# Altium PCB Main.PcbDoc (part 1 of 2)
Units mil, origin at the board's own origin, x right, y up, seen from the top; angles counter-clockwise.
Board outline 3887.19 x 3937.01 mil, 4 copper layers (Top Layer, GND, 3V3, Bottom Layer), stack 62.296 mil thick; 123 components, 108 nets, 442 pads, 608 vias.
Unrouted connection lines stored in the file: 51.
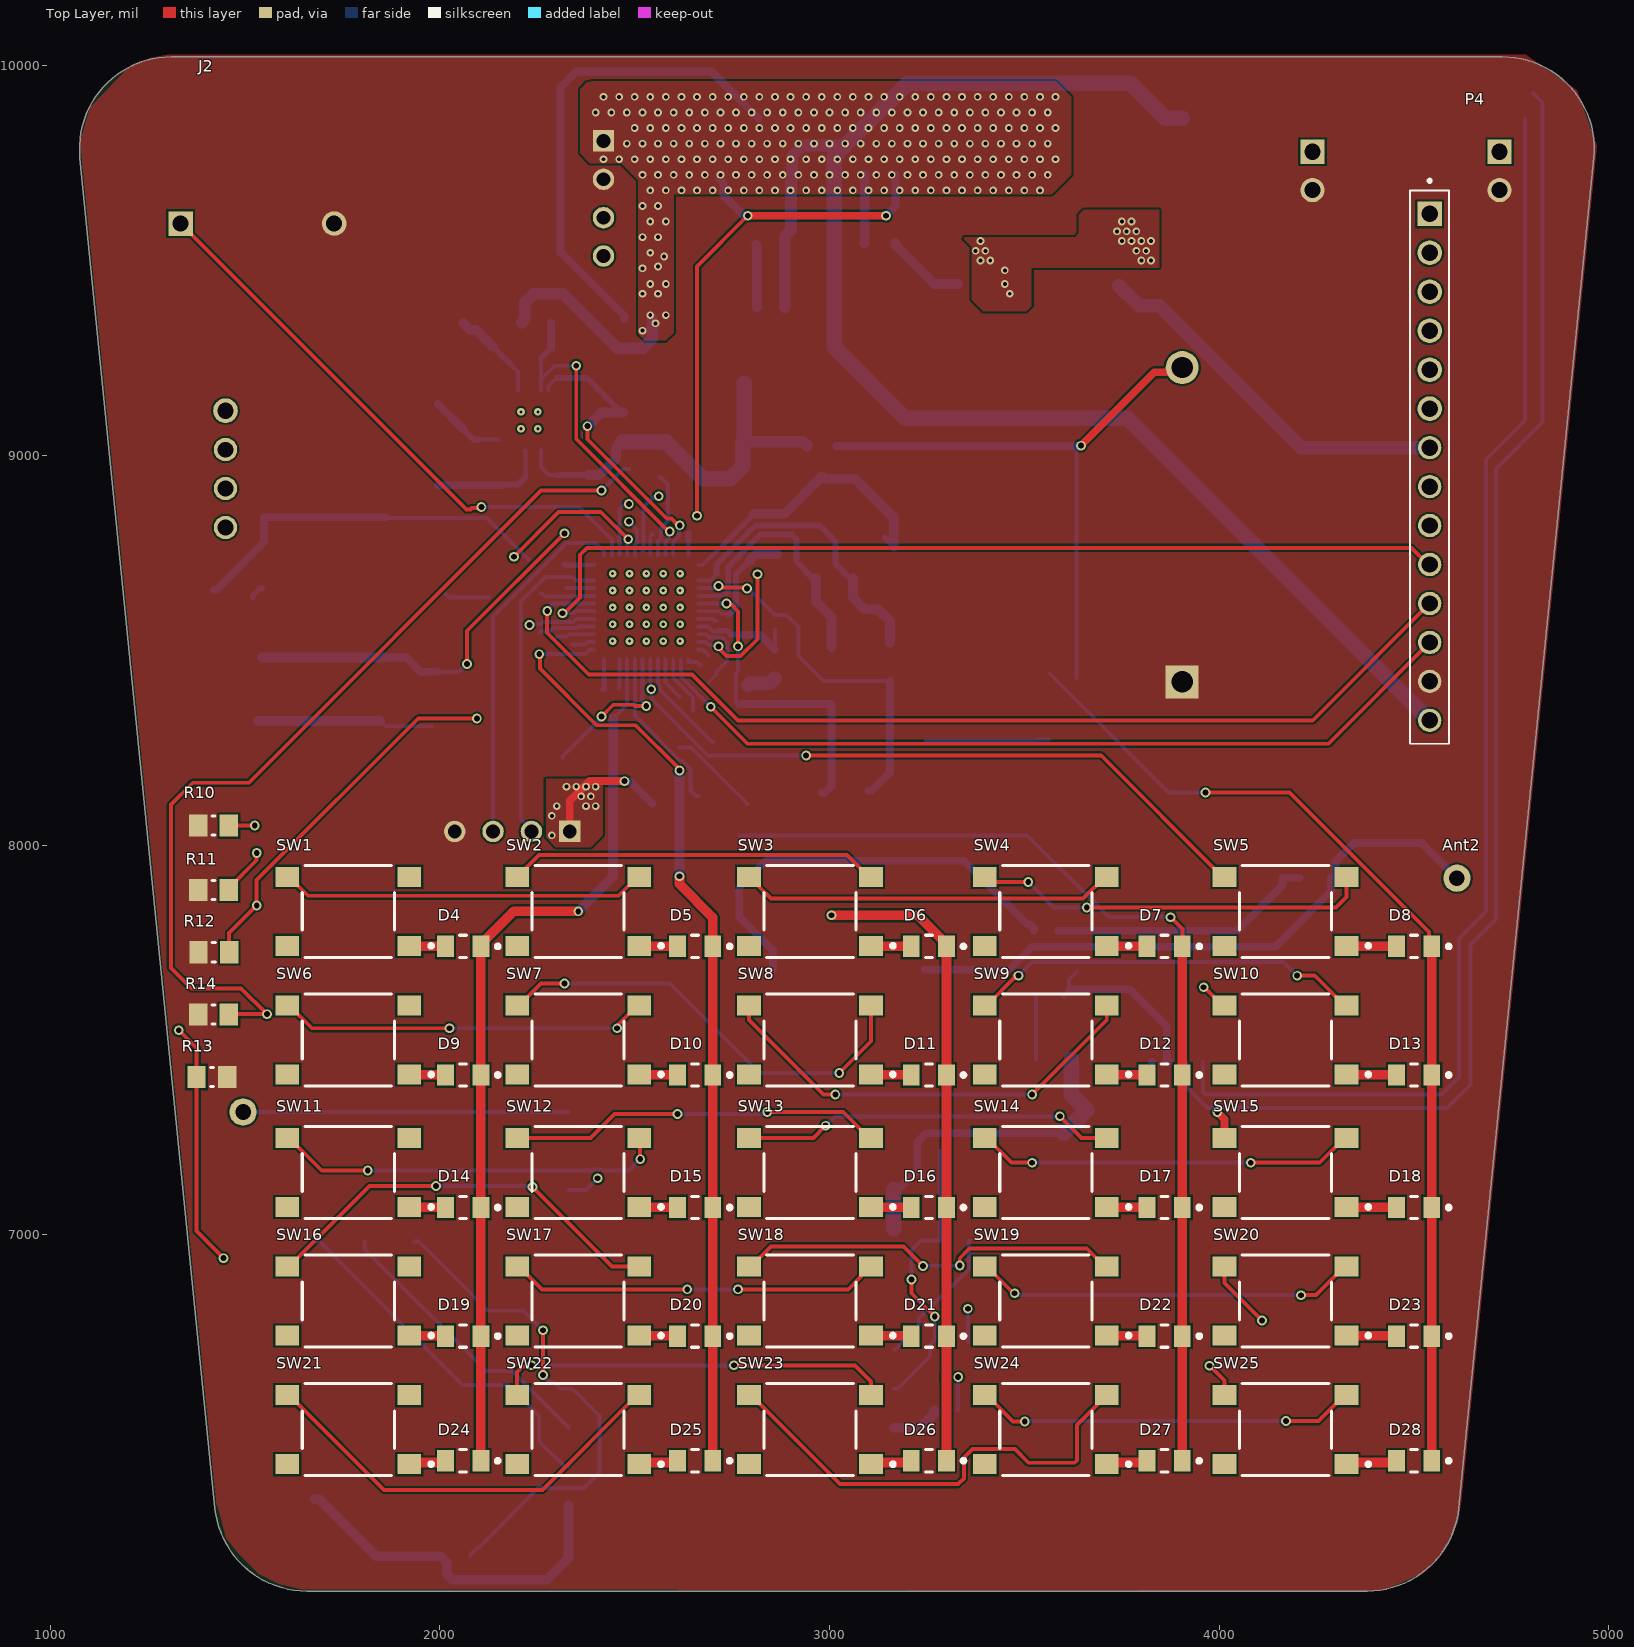
[diagram p0: Top Layer view]
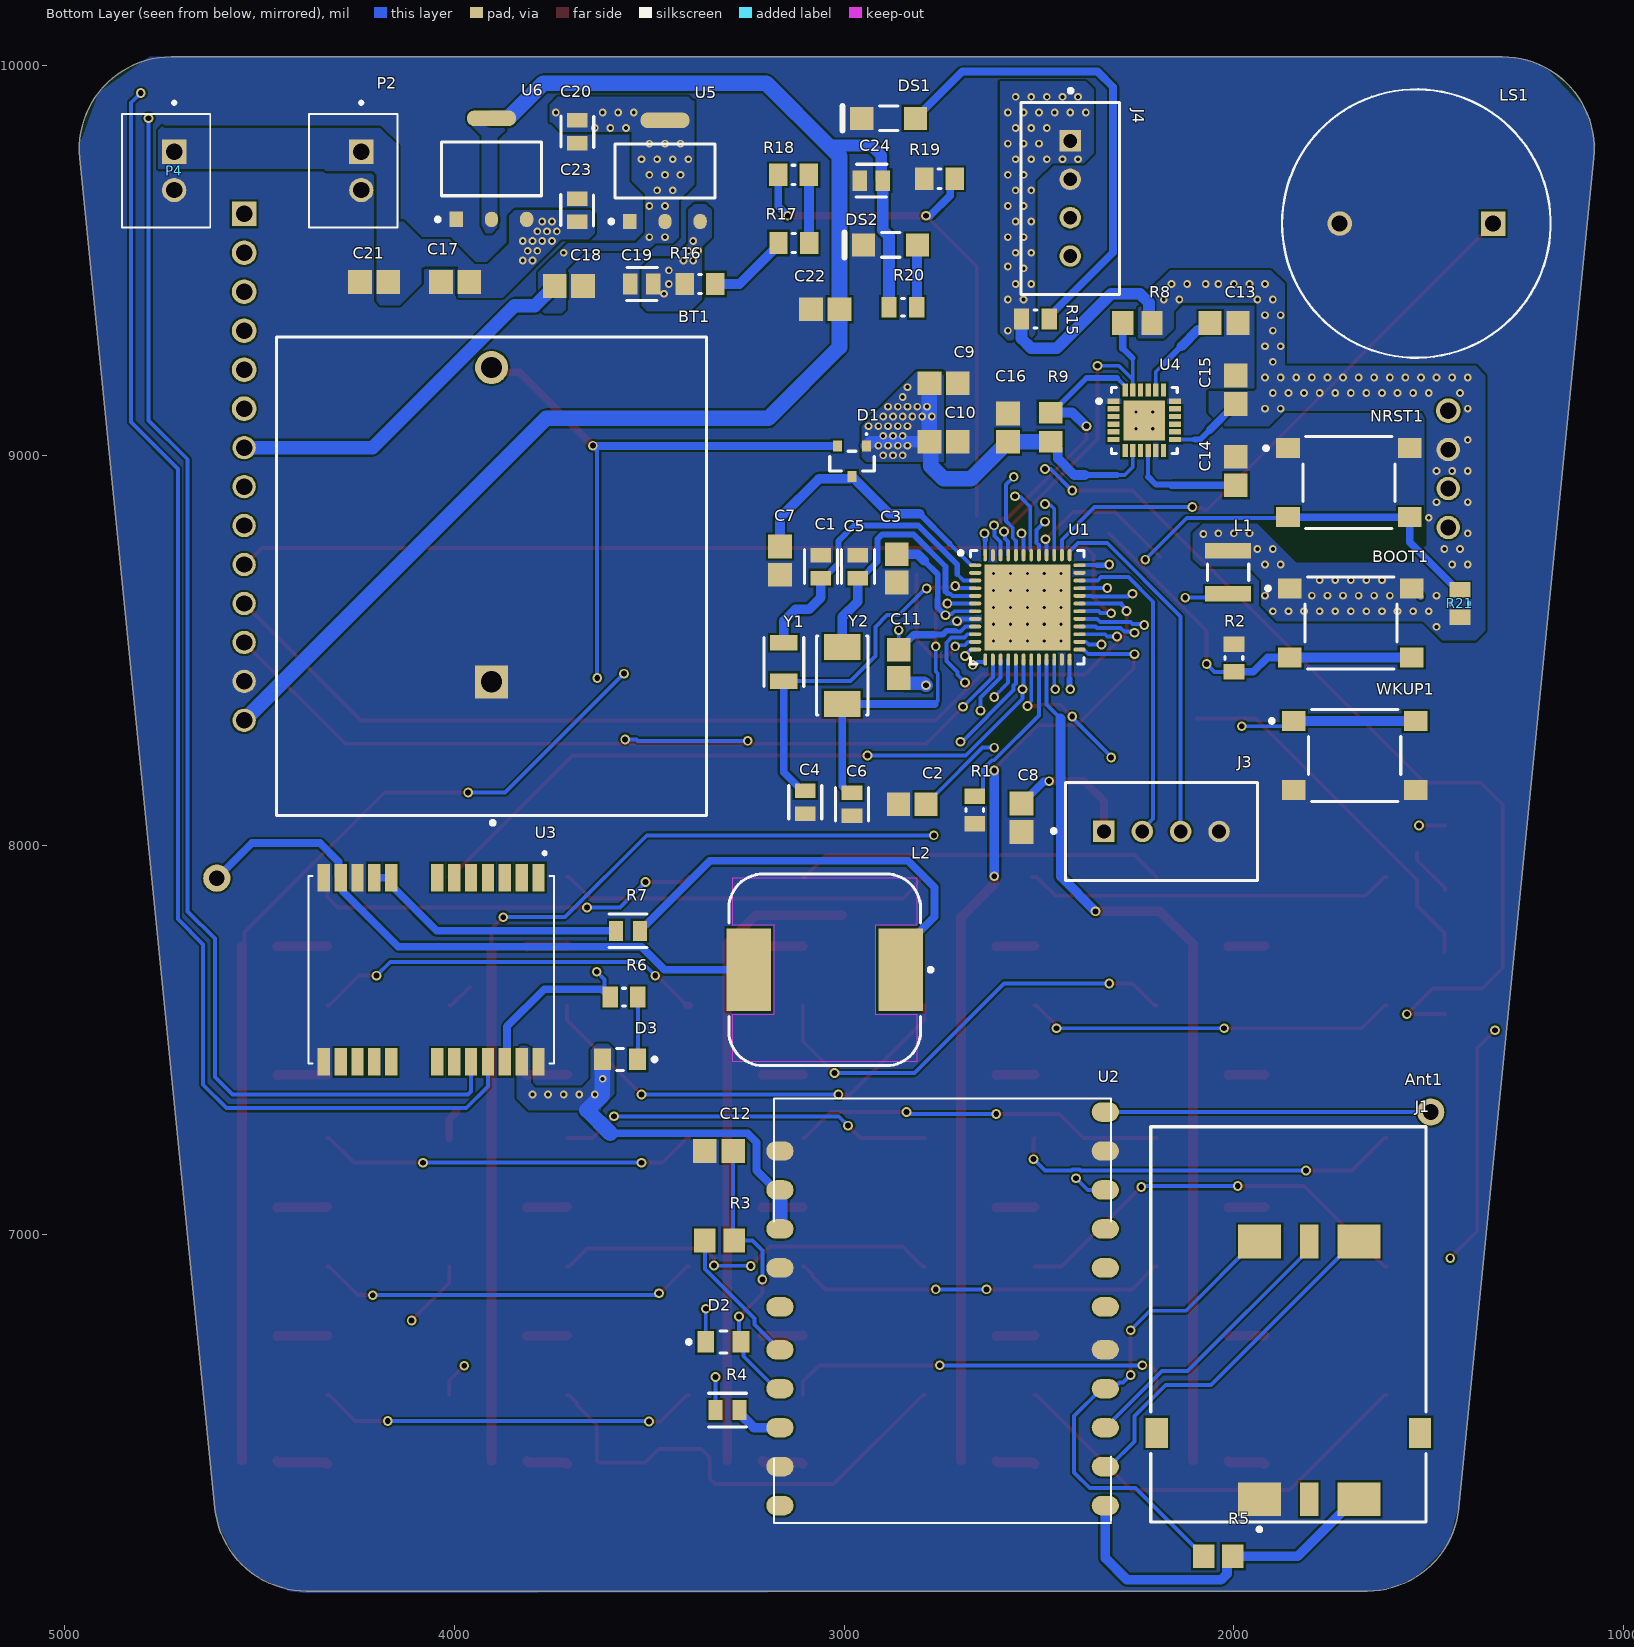
[diagram p1: Bottom Layer view, seen from below]
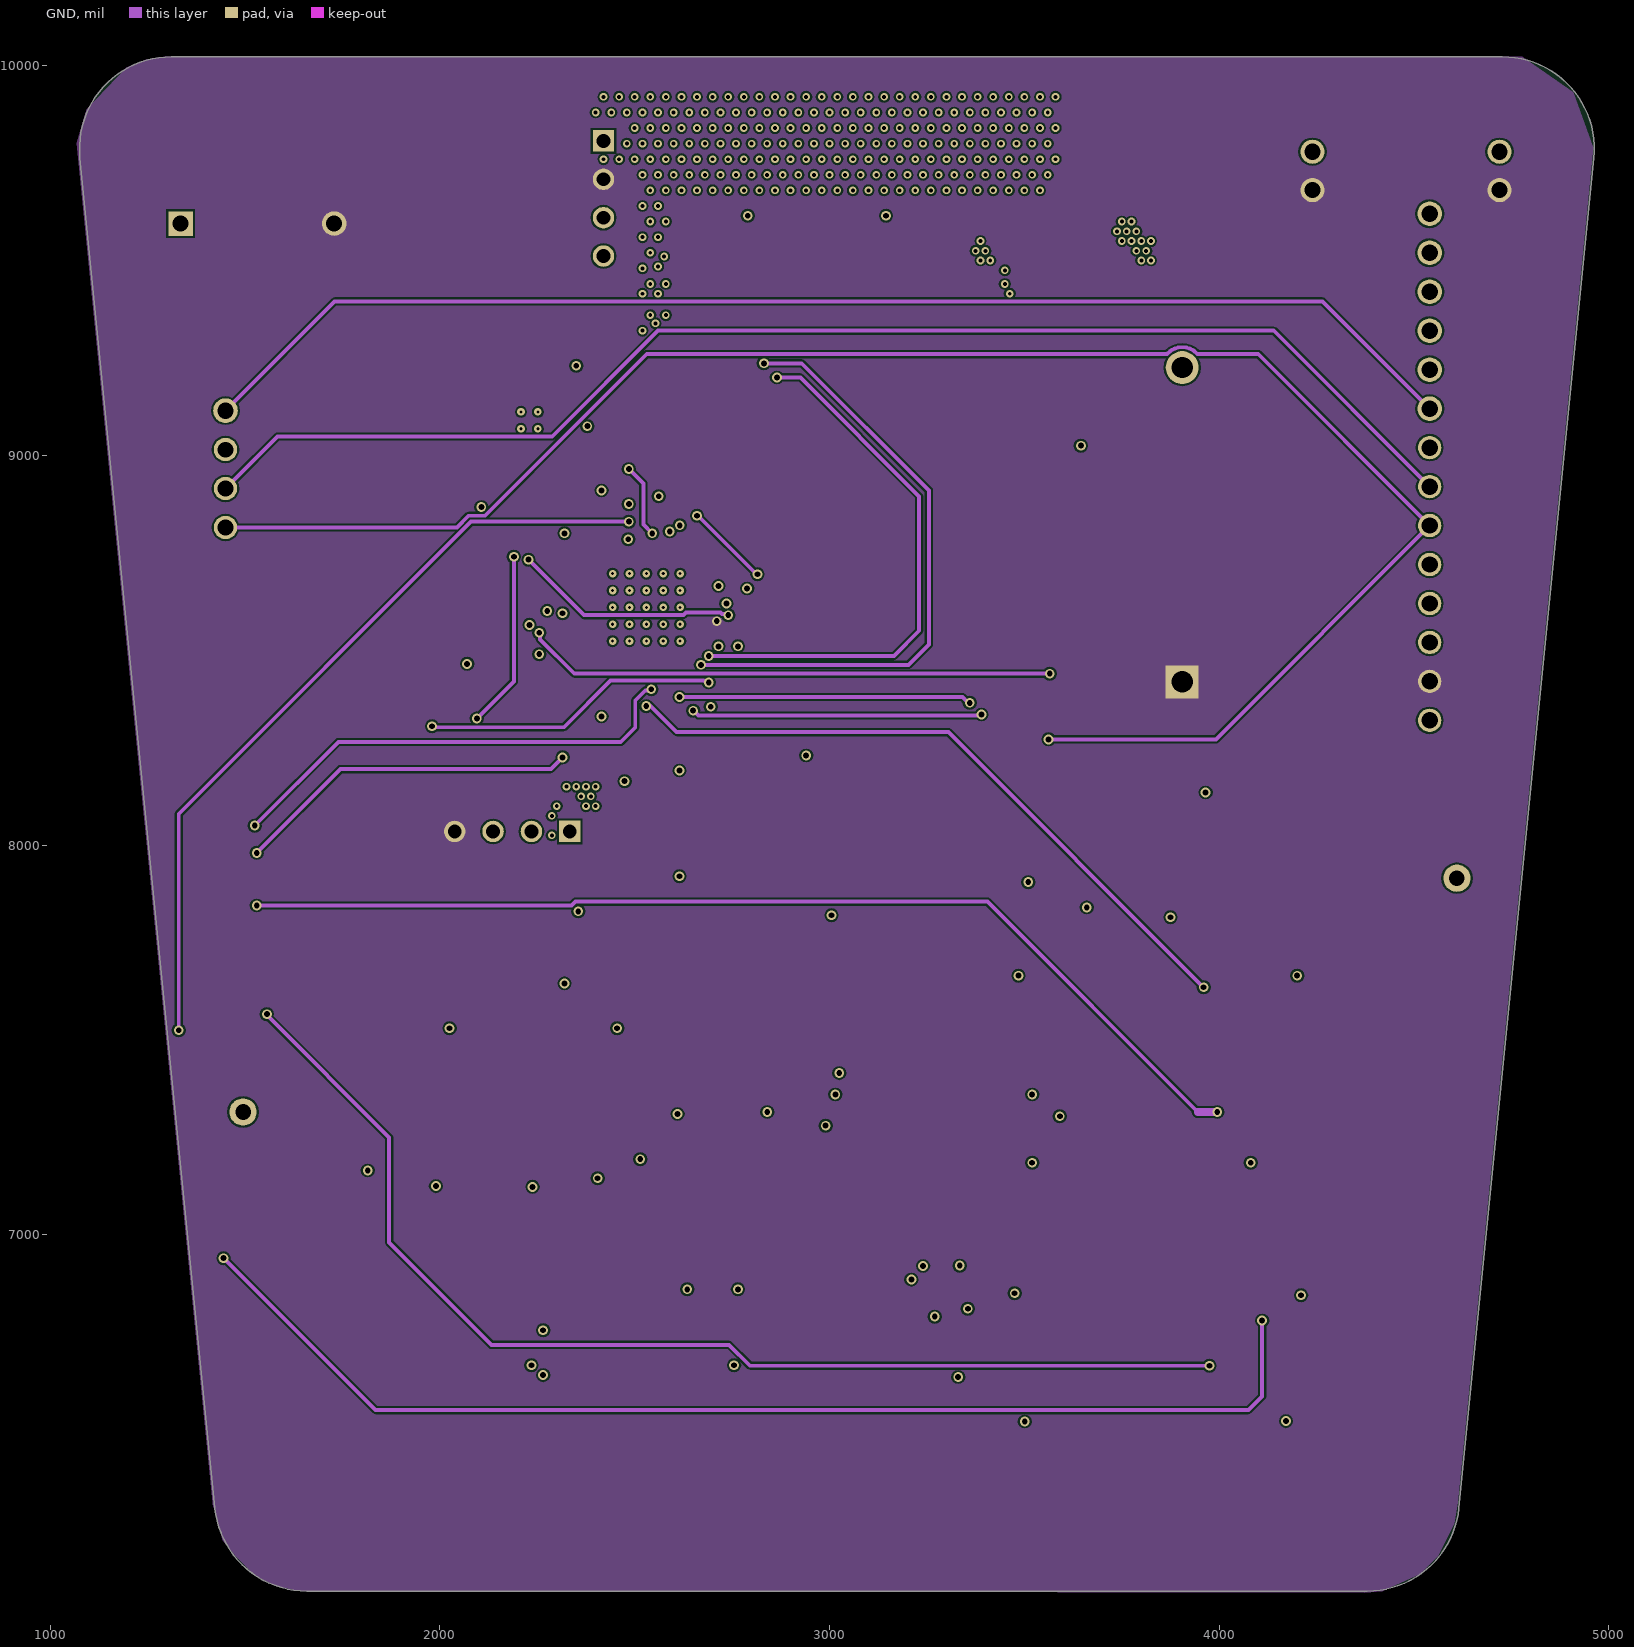
[diagram p2: GND]
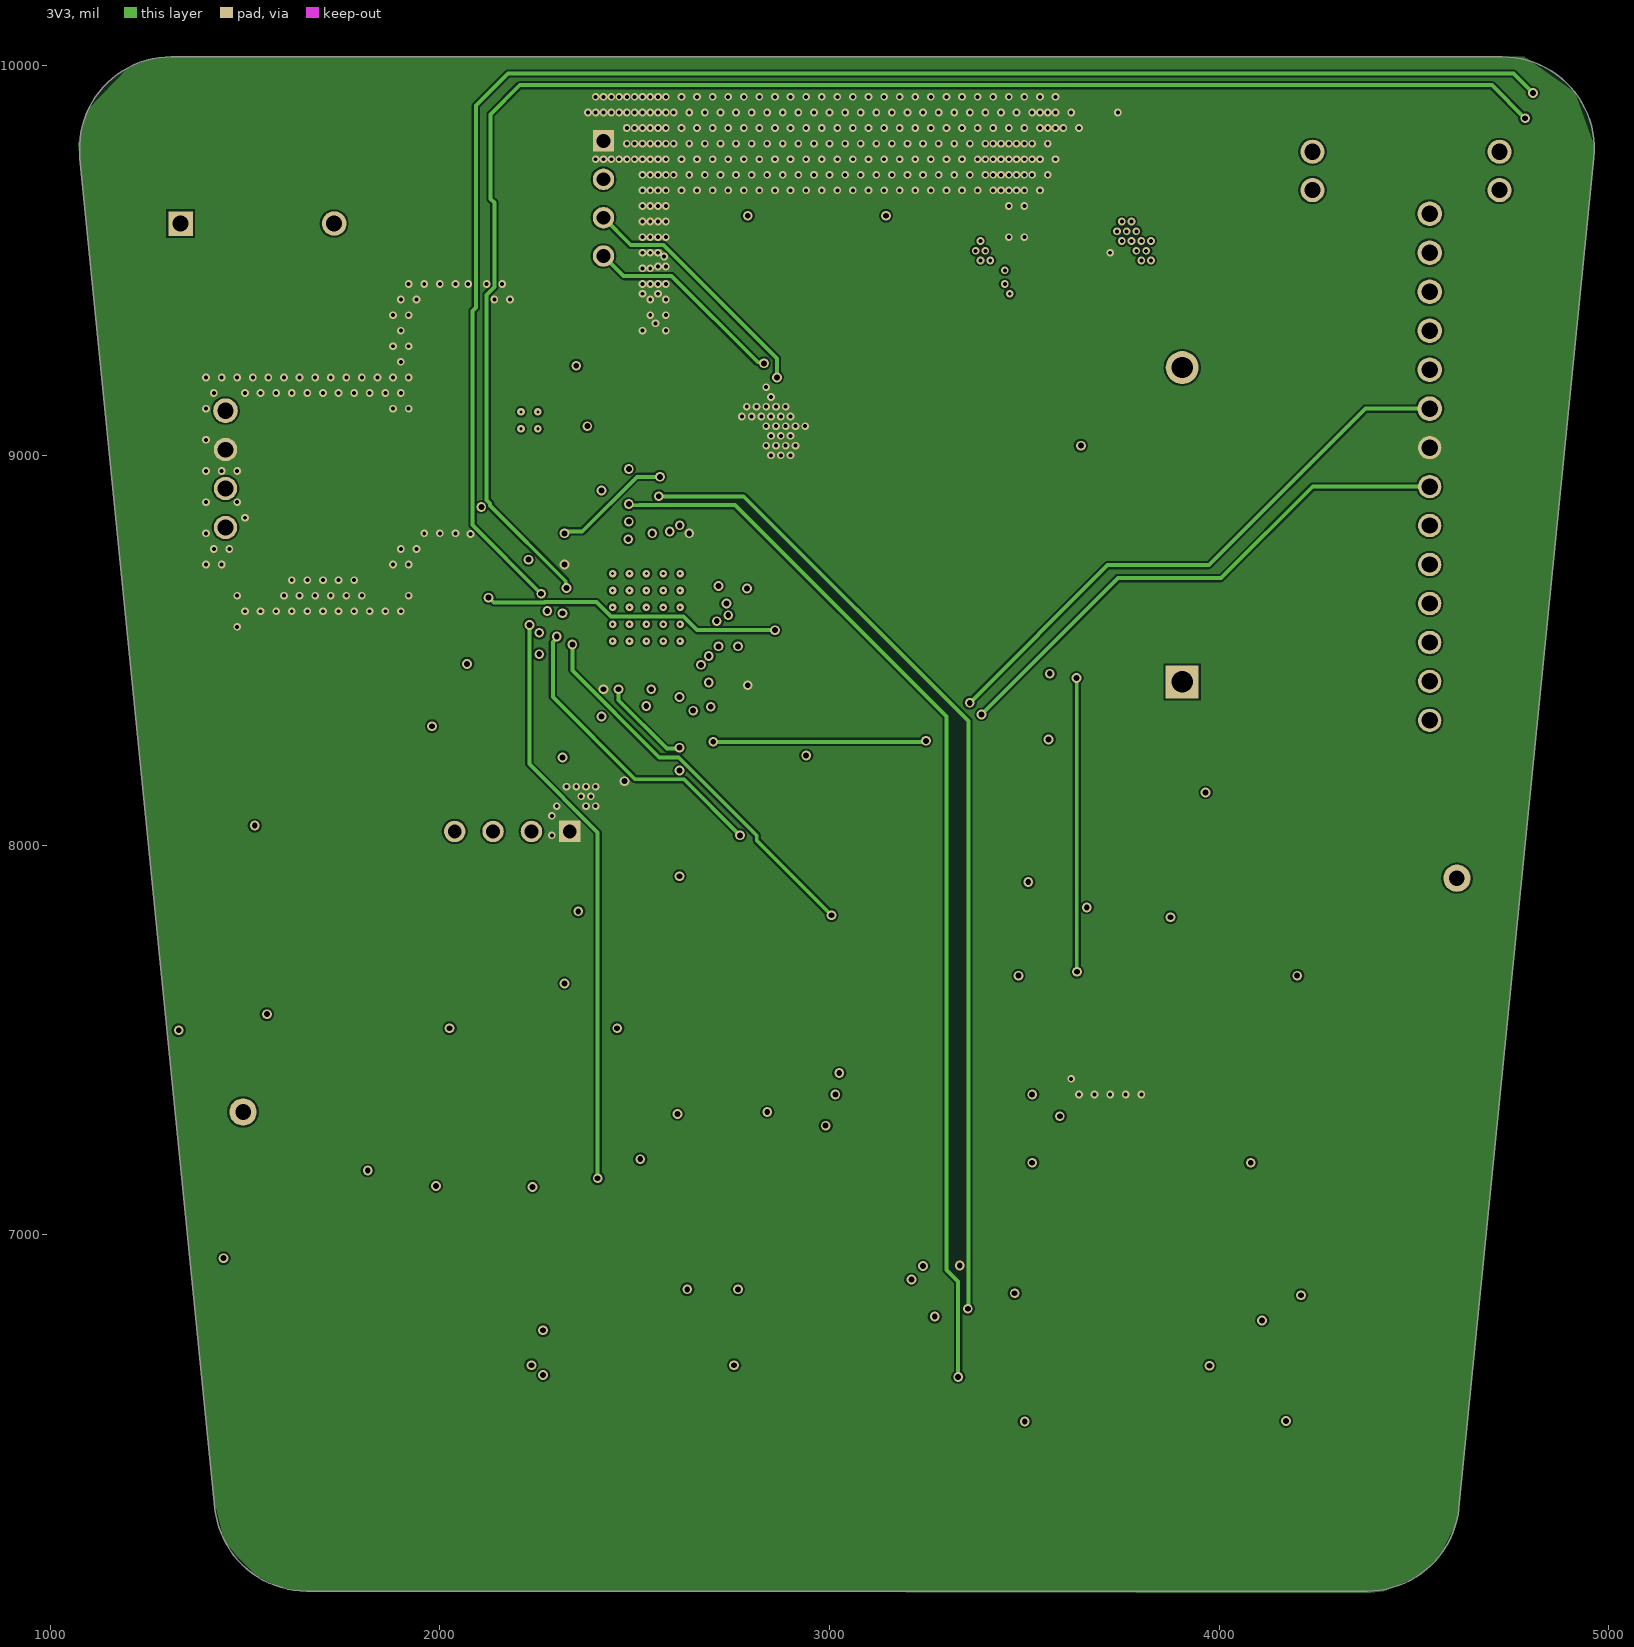
[diagram p3: 3V3]
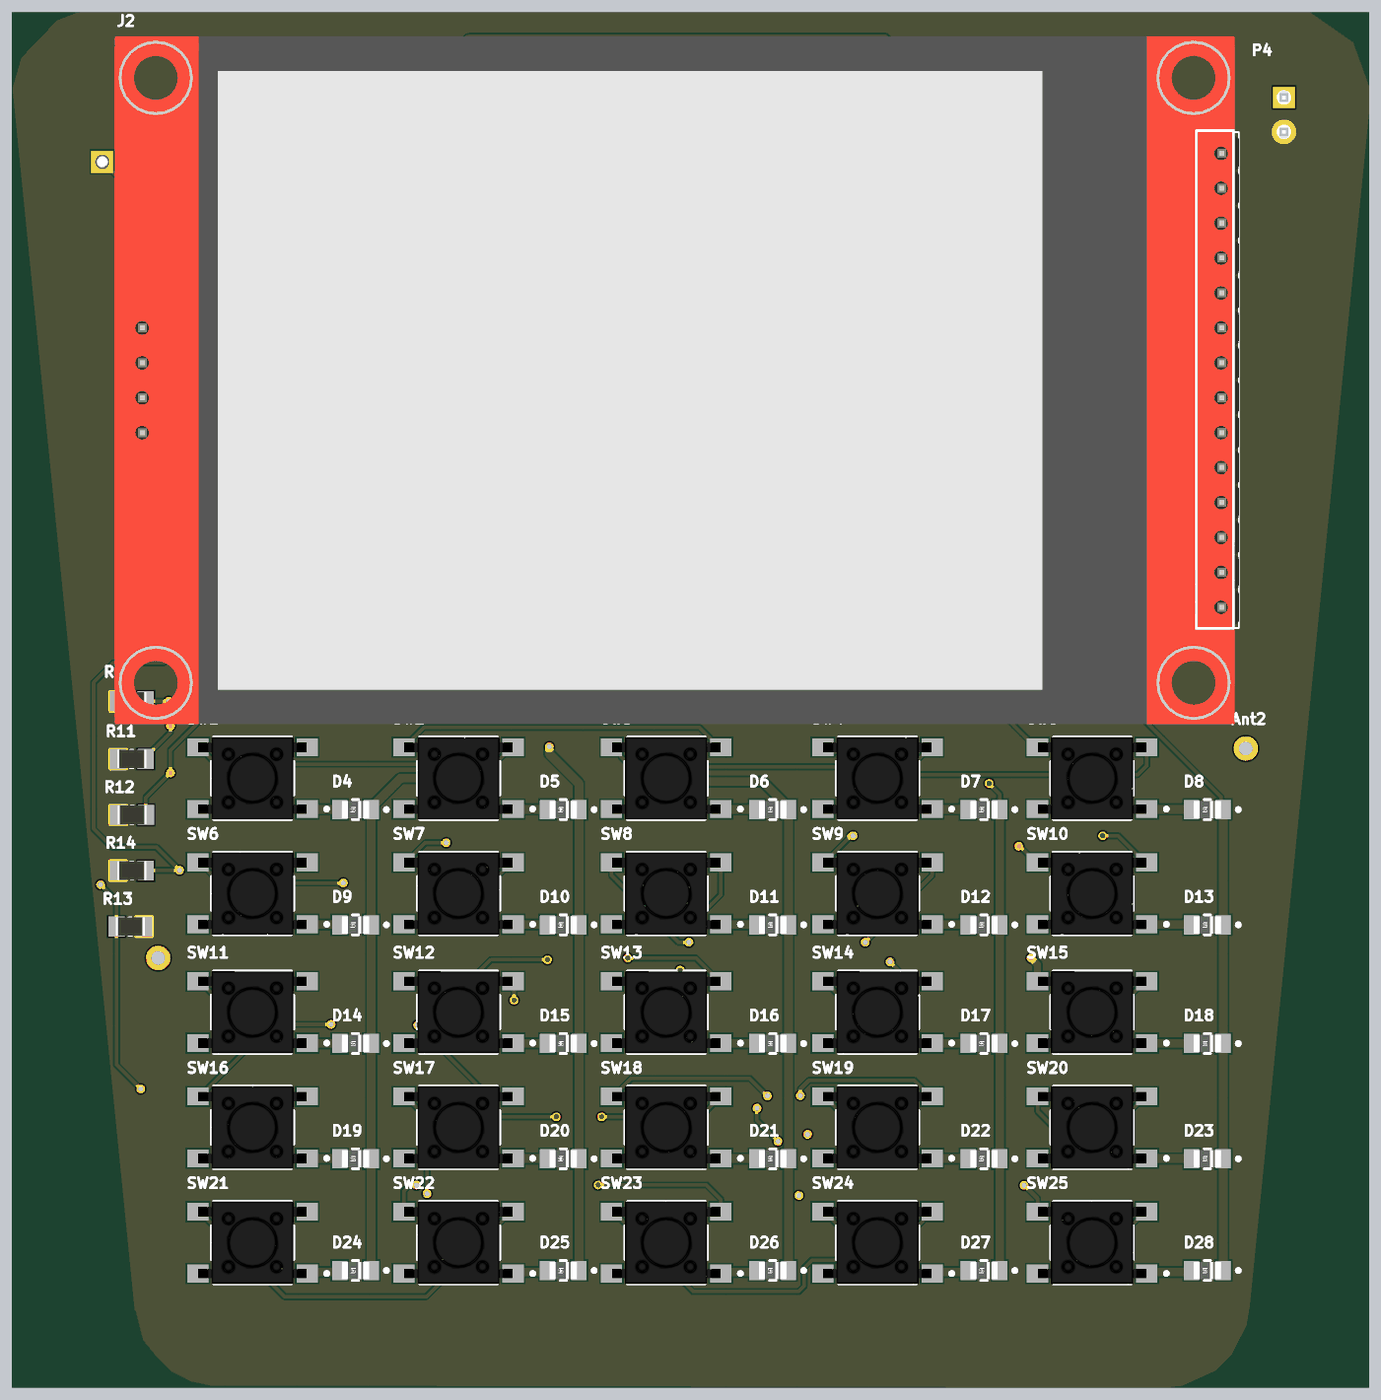
[diagram p5: 3D render of the assembled board from above, using the file's embedded part models]
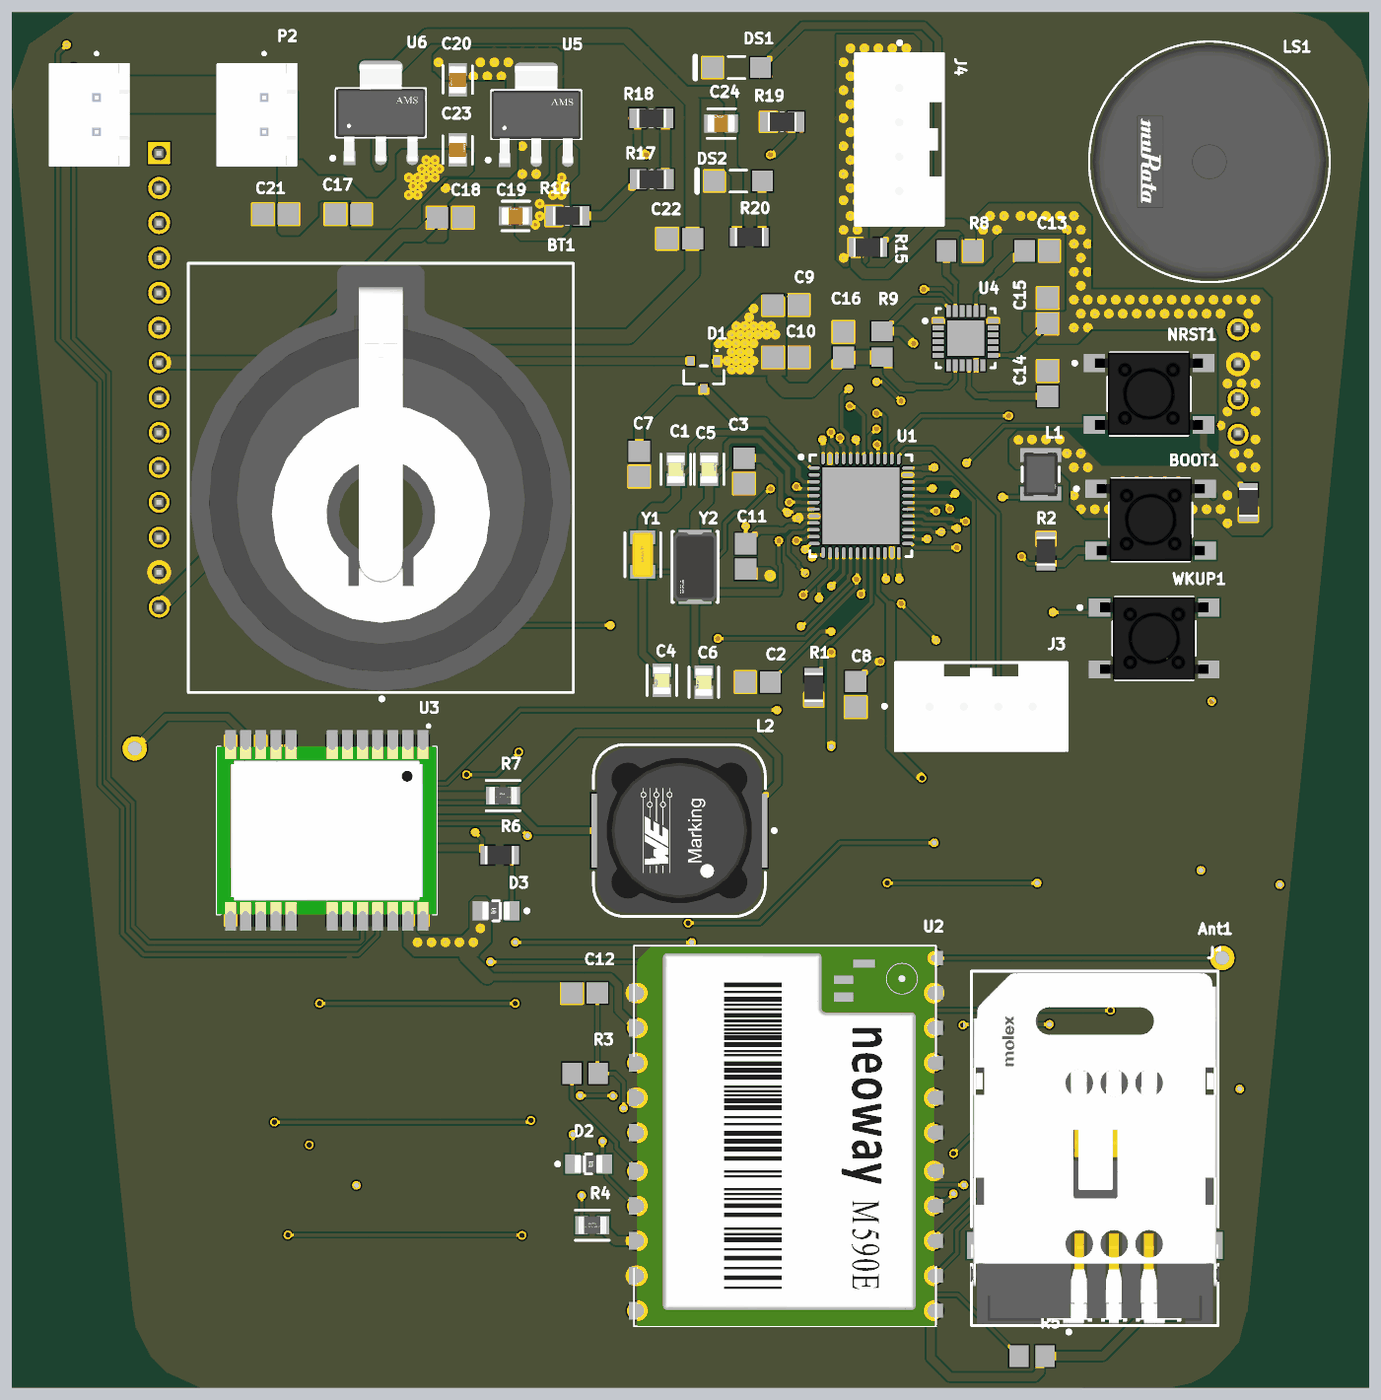
[diagram p6: 3D render of the assembled board from below, using the file's embedded part models]

## Layer stack, top to bottom
Top Solder: solder mask 1, SM-001, Dk 4
Top Layer: signal copper 1.378
Dielectric 1: prepreg 8.284, PP-017, Dk 4.4
GND: signal copper 0.689
Dielectric 3: core 41.929, Core-039, Dk 4.6
3V3: signal copper 0.3543
Dielectric 5: prepreg 8.284, PP-017, Dk 4.4
Bottom Layer: signal copper 1.378
Bottom Solder: solder mask 1, SM-001, Dk 4

## Board outline
1422.86,6298.51 1076.4,9763.08 cw(c1311.45,9786.59) 1311.45,10022.81 4726.42,10022.81 cw(c4726.42,9786.59) 4961.46,9763.08 4615.01,6298.51 cw(c4379.96,6322.02) 4379.96,6085.8 1657.91,6085.8 cw(c1657.91,6322.02)

## Design rules (kind name [scope] priority, off if disabled: settings)
Clearance Clearance_2 [All] p1: gap=5 ignorepadtopadclearanceinfootprint=TRUE
Clearance [All] p2: gap=0 ignorepadtopadclearanceinfootprint=FALSE
Clearance Clearance_1 [All] p3: gap=10 ignorepadtopadclearanceinfootprint=FALSE ismatrix=TRUE
ComponentClearance [All] p1: gap=0 collisioncheckmode=3 verticalgap=0 showdistances=FALSE
PlaneClearance [All] p1: clearance=10
PlaneConnect [All] p1: planeconnectstyle=Direct reliefexpansion=20 reliefentries=4 reliefconductorwidth=10 reliefairgap=10
PolygonConnect [All] p1: connectstyle=Direct reliefconductorwidth=10 reliefentries=4 polygonreliefangle="90 Angle" airgapwidth=10
RoutingTopology RoutingTopology_1 [InComponent('U1')] p1: topology=Starburst
RoutingTopology [All] p2: topology=Shortest
RoutingVias QFN [(InComponent('U1') OR InComponent('U4'))] p1: holewidth=4 width=5 viastyle="Through Hole" minholewidth=1 minwidth=2 maxholewidth=10 maxwidth=30
RoutingVias RoutingViaStyle_1 [All] p2: holewidth=15 width=25 viastyle="Through Hole" minholewidth=10 minwidth=15 maxholewidth=20 maxwidth=35
RoutingVias [All] p3: holewidth=28 width=50 viastyle="Through Hole" minholewidth=28 minwidth=50 maxholewidth=28 maxwidth=50
SolderMaskExpansion [All] p1: expansion=4 istentingtop=FALSE
UnpouredPolygon ModifiedPolygon_1 [All] p1:
UnpouredPolygon [All] p2:
Width MaxMinWidth_1 [All] p1: maxlimit=60 minlimit=10 preferedwidth=40 minimp=50.000000 maximp=50.000000 favimp=50.000000
Width [All] p2: maxlimit=10 minlimit=10 preferedwidth=10
25 further rules are at their usual default settings.

## Classes and differential pairs
component class "Ublox NEO-6M": Ant2 D3 L2 R6 R7 U3
component class ThermalPrinter: J4 P4
component class "TFT_LCD_2.8\" Display": J2
component class STM32: BOOT1 C1 C2 C3 C4 C5 C6 C7 C8 C9 C10 C11 D1 J3 L1 NRST1 R1 R2 R21 U1 WKUP1 Y1 Y2
component class PoweSupply: BT1 C17 C18 C19 C20 C21 C22 C23 C24 DS1 DS2 P2 R15 R16 R17 R18 R19 R20 U5 U6
component class MPU6050: C13 C14 C15 C16 R8 R9 U4
component class "M590E GSM": Ant1 C12 D2 J1 R3 R4 R5 U2
component class Buzzer: LS1
component class "6x5 Keyboard": D4 D5 D6 D7 D8 D9 D10 D11 D12 D13 D14 D15 D16 D17 D18 D19 D20 D21 D22 D23 D24 D25 D26 D27 D28 R10 R11 R12 R13 R14 SW1 SW2 SW3 SW4 SW5 SW6 SW7 SW8 SW9 SW10 SW11 SW12 SW13 SW14 SW15 SW16 SW17 SW18 SW19 SW20 SW21 SW22 SW23 SW24 SW25

## Components (designator, comment, footprint, x,y, rotation, side; value= is the part's Value field where it differs from the comment)
Ant1 "" Antenna 1495,7315 r90 bottom
Ant2 "Antenna" Antenna 4610,7915 r90 top
BOOT1 "PTS645SM43SMTR92LFS" FP-PTS645SM43SMTR92LFS-MFG 1700,8570 r180 bottom
BT1 "105" FP-105-MFG 3905,8690 r90 bottom
C1 "C0805C439C5GACTU" FP-C0805C-DN-MFG 3060,8714.53 r270 bottom value="4.3 pF"
C2 "C0805C225K9PACTU" CAPC2013X145X50ML20T25 2825.43,8105 r0 bottom value=2.2uF
C3 "08051C152KAT2A" CAPC2013X94X50ML20T25 2865,8710 r90 bottom value=100nF
C4 "C0805C439C5GACTU" FP-C0805C-DN-MFG 3100,8110 r90 bottom value="4.3 pF"
C5 "C0805C120J5GACTU" FP-C0805C-DN-MFG 2965,8714.53 r270 bottom value="12 pF"
C6 "C0805C120J5GACTU" FP-C0805C-DN-MFG 2980,8105 r90 bottom value="12 pF"
C7 "08051C152KAT2A" CAPC2013X94X50ML20T25 3165,8730 r270 bottom value=100nF
C8 "08051C152KAT2A" CAPC2013X94X50ML20T25 2545,8070 r270 bottom value=100nF
C9 "08051C152KAT2A" CAPC2013X94X50ML20T25 2745,9185 r180 bottom value=100nF
C10 "08051C152KAT2A" CAPC2013X94X50ML20T25 2745,9035 r180 bottom value=100nF
C11 "08051C152KAT2A" CAPC2013X94X50ML20T25 2860,8465 r90 bottom value=100nF
C12 "08051C152KAT2A" CAPC2013X94X50ML20T25 3321.42,7215 r180 bottom value=100pF
C13 "C0805C221J5GACTU" CAPC2013X88X50ML20T25 2025.43,9340 r0 bottom value=220pF
C14 "08051C152KAT2A" CAPC2013X94X50ML20T25 1995,8960 r270 bottom value=100nF
C15 "08051C152KAT2A" CAPC2013X94X50ML20T25 1995,9168.58 r270 bottom value=100nF
C16 "08051C152KAT2A" CAPC2013X94X50ML20T25 2580,9071.42 r270 bottom value=100nF
C17 "08051C152KAT2A" CAPC2013X94X50ML20T25 3998.58,9445 r180 bottom value=100nF
C18 "08051C152KAT2A" CAPC2013X94X50ML20T25 3706.42,9435 r0 bottom value=100nF
C19 "C0805C106K9PACTU" FP-C0805C106K9PACTU-MFG 3519.53,9440 r0 bottom
C20 "C0805C106K9PACTU" FP-C0805C106K9PACTU-MFG 3685,9830 r270 bottom
C21 "08051C152KAT2A" CAPC2013X94X50ML20T25 4206.42,9445 r180 bottom value=100nF
C22 "08051C152KAT2A" CAPC2013X94X50ML20T25 3048.58,9375 r180 bottom value=100nF
C23 "C0805C106K9PACTU" FP-C0805C106K9PACTU-MFG 3685,9629.53 r90 bottom
C24 "C0805C106K9PACTU" FP-C0805C106K9PACTU-MFG 2930.47,9705 r0 bottom
D1 "BAT54C" NXP-SOT23-3_V 2980,8985 r180 bottom
D2 "TS4148 RYG" FP-TS4148_RYG-MFG 3310,6725 r180 bottom
D3 "TS4148 RYG" FP-TS4148_RYG-MFG 3575.28,7450 r0 bottom
D4 "TS4148 RYG" FP-TS4148_RYG-MFG 2060,7740 r180 top locked
D5 "TS4148 RYG" FP-TS4148_RYG-MFG 2655,7740 r180 top locked
D6 "TS4148 RYG" FP-TS4148_RYG-MFG 3255,7740 r180 top locked
D7 "TS4148 RYG" FP-TS4148_RYG-MFG 3860,7740 r180 top locked
D8 "TS4148 RYG" FP-TS4148_RYG-MFG 4500,7740 r180 top locked
D9 "TS4148 RYG" FP-TS4148_RYG-MFG 2060,7410 r180 top locked
D10 "TS4148 RYG" FP-TS4148_RYG-MFG 2655,7410 r180 top locked
D11 "TS4148 RYG" FP-TS4148_RYG-MFG 3255,7410 r180 top locked
D12 "TS4148 RYG" FP-TS4148_RYG-MFG 3860,7410 r180 top locked
D13 "TS4148 RYG" FP-TS4148_RYG-MFG 4500,7410 r180 top locked
D14 "TS4148 RYG" FP-TS4148_RYG-MFG 2060,7070 r180 top locked
D15 "TS4148 RYG" FP-TS4148_RYG-MFG 2655,7070 r180 top locked
D16 "TS4148 RYG" FP-TS4148_RYG-MFG 3255,7070 r180 top locked
D17 "TS4148 RYG" FP-TS4148_RYG-MFG 3860,7070 r180 top locked
D18 "TS4148 RYG" FP-TS4148_RYG-MFG 4500,7070 r180 top locked
D19 "TS4148 RYG" FP-TS4148_RYG-MFG 2060,6740 r180 top locked
D20 "TS4148 RYG" FP-TS4148_RYG-MFG 2655,6740 r180 top locked
D21 "TS4148 RYG" FP-TS4148_RYG-MFG 3255,6740 r180 top locked
D22 "TS4148 RYG" FP-TS4148_RYG-MFG 3860,6740 r180 top locked
D23 "TS4148 RYG" FP-TS4148_RYG-MFG 4500,6740 r180 top locked
D24 "TS4148 RYG" FP-TS4148_RYG-MFG 2060,6420 r180 top locked
D25 "TS4148 RYG" FP-TS4148_RYG-MFG 2655,6420 r180 top locked
D26 "TS4148 RYG" FP-TS4148_RYG-MFG 3255,6420 r180 top locked
D27 "TS4148 RYG" FP-TS4148_RYG-MFG 3860,6420 r180 top locked
D28 "TS4148 RYG" FP-TS4148_RYG-MFG 4500,6420 r180 top locked
DS1 "HSMH-C150" AVAG-HSMX-C150_V 2886.1,9865 r0 bottom
DS2 "HSMH-C150" AVAG-HSMX-C150_V 2881.1,9540 r0 bottom
J1 "47388-2001" FP-47388-2001-MFG 1860,6770 r90 bottom
J2 "Display Headers" "Display Without Cutouts" 2980,8970 r270 top locked
J3 "B04B-XASK-1(LF)(SN)" FP-B04B-XASK-1_LF_SN-MFG 2185.79,8035 r0 bottom
J4 "B04B-XASK-1(LF)(SN)" FP-B04B-XASK-1_LF_SN-MFG 2420,9659.21 r90 bottom
L1 "IMC1210ER100K" FP-IMC-1210-MFG 2015,8700.12 r90 bottom
L2 "744770127" WE-PD_1280 3050,7680 r90 bottom
LS1 "PKM17EPPH4001-B0" FP-PKM17EPPH4001-B0-MFG 1531.85,9595 r0 bottom
NRST1 "PTS645SM43SMTR92LFS" FP-PTS645SM43SMTR92LFS-MFG 1705,8930 r180 bottom
P2 "Battery Connector" JST_B2B-XH-A(LF)(SN) 4260,9730 r90 bottom
P4 "Battery Connector" JST_B2B-XH-A(LF)(SN) 4740,9730 r90 bottom
R1 "RC0805FR-0710KL" RESC2013X60X35NL10T20 2665,8090 r90 bottom value=10k
R2 "RC0805FR-0710KL" RESC2013X60X35NL10T20 2000,8480 r270 bottom value=10k
R3 "ERA6AEB472V" RESC2013X60X40ML20T25 3320,6985 r180 bottom value=4.7k
R4 "CRGCQ0805F22R" FP-CRGCQ0805-IPC_C 3299.45,6550 r180 bottom value=220Ω
R5 "ERA6AEB472V" RESC2013X60X40ML20T25 2040,6175 r0 bottom value=4.7k
R6 "RC0805FR-0710KL" RESC2013X60X35NL10T20 3565,7610 r180 bottom value=10k
R7 "CRGCQ0805F22R" FP-CRGCQ0805-IPC_C 3555,7780 r180 bottom value=22Ω
R8 "ERA6AEB472V" RESC2013X60X40ML20T25 2247.6,9340 r0 bottom value=4.7k
R9 "ERA6AEB472V" RESC2013X60X40ML20T25 2470,9072.4 r90 bottom value=4.7k
R10 "RC0805FR-071KL" RESC2013X60X35ML10T20 1419.37,8050 r0 top
R11 "RC0805FR-071KL" RESC2013X60X35ML10T20 1419.37,7885 r0 top
R12 "RC0805FR-071KL" RESC2013X60X35ML10T20 1420,7725 r0 top
R13 "RC0805FR-071KL" RESC2013X60X35ML10T20 1415,7405 r180 top
R14 "RC0805FR-071KL" RESC2013X60X35ML10T20 1419.37,7565 r0 top
R15 "RC0805FR-0710KL" RESC2013X60X35NL10T20 2509.57,9350 r180 bottom value=10k
R16 "RC0805FR-071KL" RESC2013X60X35ML10T20 3370,9440 r0 bottom
R17 "RC0805FR-071KL" RESC2013X60X35ML10T20 3129.37,9545 r0 bottom
R18 "RC0805FR-071KL" RESC2013X60X35ML10T20 3130,9720 r180 bottom
R19 "RC0805FR-071KL" RESC2013X60X35ML10T20 2755.63,9710 r180 bottom
R20 "RC0805FR-0710KL" RESC2013X60X35NL10T20 2849.57,9380 r180 bottom value=10k
R21 "RC0805FR-0710KL" RESC2013X60X35NL10T20 1420,8620 r90 bottom value=10k
SW1 "PTS645SM43SMTR92LFS" FP-PTS645SM43SMTR92LFS-MFG 1765,7830 r180 top locked
SW2 "PTS645SM43SMTR92LFS" FP-PTS645SM43SMTR92LFS-MFG 2355,7830 r180 top locked
SW3 "PTS645SM43SMTR92LFS" FP-PTS645SM43SMTR92LFS-MFG 2950,7830 r180 top locked
SW4 "PTS645SM43SMTR92LFS" FP-PTS645SM43SMTR92LFS-MFG 3555,7830 r180 top locked
SW5 "PTS645SM43SMTR92LFS" FP-PTS645SM43SMTR92LFS-MFG 4170,7830 r180 top locked
SW6 "PTS645SM43SMTR92LFS" FP-PTS645SM43SMTR92LFS-MFG 1765,7500 r180 top locked
SW7 "PTS645SM43SMTR92LFS" FP-PTS645SM43SMTR92LFS-MFG 2355,7500 r180 top locked
SW8 "PTS645SM43SMTR92LFS" FP-PTS645SM43SMTR92LFS-MFG 2950,7500 r180 top locked
SW9 "PTS645SM43SMTR92LFS" FP-PTS645SM43SMTR92LFS-MFG 3555,7500 r180 top locked
SW10 "PTS645SM43SMTR92LFS" FP-PTS645SM43SMTR92LFS-MFG 4170,7500 r180 top locked
SW11 "PTS645SM43SMTR92LFS" FP-PTS645SM43SMTR92LFS-MFG 1765,7160 r180 top locked
SW12 "PTS645SM43SMTR92LFS" FP-PTS645SM43SMTR92LFS-MFG 2355,7160 r180 top locked
SW13 "PTS645SM43SMTR92LFS" FP-PTS645SM43SMTR92LFS-MFG 2950,7160 r180 top locked
SW14 "PTS645SM43SMTR92LFS" FP-PTS645SM43SMTR92LFS-MFG 3555,7160 r180 top locked
SW15 "PTS645SM43SMTR92LFS" FP-PTS645SM43SMTR92LFS-MFG 4170,7160 r180 top locked
SW16 "PTS645SM43SMTR92LFS" FP-PTS645SM43SMTR92LFS-MFG 1765,6830 r180 top locked
SW17 "PTS645SM43SMTR92LFS" FP-PTS645SM43SMTR92LFS-MFG 2355,6830 r180 top locked
SW18 "PTS645SM43SMTR92LFS" FP-PTS645SM43SMTR92LFS-MFG 2950,6830 r180 top locked
SW19 "PTS645SM43SMTR92LFS" FP-PTS645SM43SMTR92LFS-MFG 3555,6830 r180 top locked
SW20 "PTS645SM43SMTR92LFS" FP-PTS645SM43SMTR92LFS-MFG 4170,6830 r180 top locked
SW21 "PTS645SM43SMTR92LFS" FP-PTS645SM43SMTR92LFS-MFG 1765,6500 r180 top locked
SW22 "PTS645SM43SMTR92LFS" FP-PTS645SM43SMTR92LFS-MFG 2355,6500 r180 top locked
SW23 "PTS645SM43SMTR92LFS" FP-PTS645SM43SMTR92LFS-MFG 2950,6500 r180 top locked
SW24 "PTS645SM43SMTR92LFS" FP-PTS645SM43SMTR92LFS-MFG 3555,6500 r180 top locked
SW25 "PTS645SM43SMTR92LFS" FP-PTS645SM43SMTR92LFS-MFG 4170,6500 r180 top locked
U1 "STM32F411CEU6" STM-UFQFPN48_L 2530,8610 r180 bottom
U2 "Neoway_M590E" Neoway-M590E 2725,6730 r180 bottom
U3 "NEO-6M-GPS" XCVR_NEO-6M-GPS 4060,7680 r270 bottom
U4 "MPU-6050" IS-QFN-24_V 2230,9090 r180 bottom
U5 "AMS1117-3.3" FP-AMS1117-IPC_C 3460,9730 r90 bottom
U6 "AMS1117-5.0" FP-AMS1117-IPC_C 3905,9735.28 r90 bottom
WKUP1 "PTS645SM43SMTR92LFS" FP-PTS645SM43SMTR92LFS-MFG 1690,8230 r180 bottom
Y1 "ABS07-120-32.768KHZ-T" FP-ABS07-120-MFG 3155,8470 r270 bottom
Y2 "AA-25.000MALE-T" FP-AA-MFG 3005,8435 r270 bottom

## Footprints (in the part's own frame and the unit in brackets; to place one, negate y for a bottom-side part, rotate by r counter-clockwise, add the part's x,y. Pads: shape width x height; smd on the part's side, far side on the other; paste and mask are expansions set on the pad)
Antenna [mil]
  round 70 hole 40: 1(0,0)
AVAG-HSMX-C150_V [mm] "SMD, 2-Leads, Body 3.2x1.6mm"
  rect 1.5x1.5 smd: 1(-1.75,0) 2(1.75,0)
  silkscreen extent -0.6,-0.8 3,0.8, body extent -1.6,-0.8 1.6,0.8, height 1.1
CAPC2013X88X50ML20T25 [mm] "Chip Capacitor, 2-Leads, Body 2.00x1.25mm, IPC Low Density"
  rect 1.5x1.55 smd: 1(-0.9,0) 2(0.9,0)
  body extent -1.1,-0.72 1.1,0.72, height 0.88
CAPC2013X94X50ML20T25 [mm] "Chip Capacitor, 2-Leads, Body 2.01x1.25mm, IPC Low Density"
  rect 1.55x1.55 smd: 1(-0.925,0) 2(0.925,0)
  body extent -1.1,-0.72 1.11,0.72, height 0.94
CAPC2013X145X50ML20T25 [mm] "Chip Capacitor, 2-Leads, Body 2.00x1.25mm, IPC Low Density"
  rect 1.5x1.55 smd: 1(-0.9,0) 2(0.9,0)
  body extent -1.1,-0.72 1.1,0.72, height 1.45
"Display Without Cutouts" [mil]
  rect 63.19x63.19 / inner round 63.19 / far side rect 63.19x63.19 hole 42.13: 1(-650,1560)
  round 63.19 hole 42.13: 2(-550,1560) 3(-450,1560) 4(-350,1560) 5(-250,1560) 6(-150,1560) 6(-145,-1530)
  round 60 hole 42: 7(-50,1560) 8(50,1560) 9(150,1560) 10(250,1560) 11(350,1560) 12(450,1560) 13(550,1560) 14(650,1560)
  round 60 hole 40: 7(-45,-1530) 8(55,-1530) 9(155,-1530)
  silkscreen extent -739,1510 710,1610, body extent -984,-1610 985,1611, height 320
FP-105-MFG [mm]
  rect 2.145x2.145 hole 1.395 paste-2539.97 mask+0: 1(-6.89,0)
  round 2.145 hole 1.395 paste-2539.97 mask+0: 2(13.6,0)
  silkscreen extent -16.2,-14.01 15.6,14.01, body extent -15.48,-13.88 15.48,13.88, height 8.76
FP-47388-2001-MFG [mm]
  rect 1.95x1.45 smd paste+0 mask+0: 1(-7.07,8.58) 2(-7.07,-8.58)
  rect 2.2x2.8 smd paste+0 mask+0: C1(-11.4,-4.6) C3(-11.4,1.88) C5(5.4,-4.6) C7(5.4,1.88)
  rect 2.2x1.2 smd paste+0 mask+0: C2(-11.4,-1.36) C6(5.4,-1.36)
  silkscreen extent -13.48,-8.97 12.89,8.97, body extent -12.76,-9.05 12.76,9.05, height 2
FP-AA-MFG [mm]
  rect 1.7x2.4 smd paste+0 mask+0: 1(-1.85,0) 2(1.85,0)
  silkscreen extent -2.58,-1.67 2.58,1.67, body extent -2.5,-1.6 2.5,1.6, height 1.35
FP-ABS07-120-MFG [mm]
  rect 1x1.8 smd paste+0 mask+0: 1(-1.25,0) 2(1.25,0)
  silkscreen extent -1.6,-1.3 1.6,1.3, body extent -1.6,-0.75 1.6,0.75, height 0.9
FP-AMS1117-IPC_C [mm]
  rect 1.004x0.872 smd paste+0 mask+0: 1(-3.295,2.29)
  rrect100% 1.004x0.872 smd paste+0 mask+0: 2(-3.295,0) 3(-3.295,-2.29)
  rrect87% 1.004x3.182 smd paste+0 mask+0: 4(3.295,0)
  silkscreen extent -3.42,-3.25 1.75,3.63, body extent -3.53,-3.25 3.53,3.25, height 1.8
FP-B04B-XASK-1_LF_SN-MFG [mm]
  rect 1.4x1.4 hole 0.9 paste-2539.97 mask+0: 1(3.75,0)
  round 1.4 hole 0.9 paste-2539.97 mask+0: 2(1.25,0) 3(-1.25,0) 4(-3.75,0)
  silkscreen extent -6.25,-3.2 7.15,3.2, body extent -6.25,-3.2 6.25,3.2, height 8.8
FP-C0805C106K9PACTU-MFG [mm]
  rect 0.95x1.35 smd paste+0 mask+0: 1(-0.75,0) 2(0.75,0)
  silkscreen extent -1.03,-1.07 1,1.07, body extent -1,-0.63 1,0.63, height 1.4
FP-C0805C-DN-MFG [mm]
  rect 0.95x1.35 smd paste+0 mask+0: 1(-0.75,0) 2(0.75,0)
  silkscreen extent -1.1,-1.07 1.1,1.07, body extent -1,-0.63 1,0.63, height 0.88
FP-CRGCQ0805-IPC_C [mil]
  rect 35.67x51.57 smd paste+0 mask+0: 1(-30.55,0) 2(30.55,0)
  silkscreen extent -48,-43 48,43, body extent -39,-25 39,25, height 26
FP-IMC-1210-MFG [mm]
  rect 1x3 smd paste+0 mask+0: 1(-1.4,0) 2(1.4,0)
  silkscreen extent -0.53,-1.35 0.53,1.35, body extent -1.6,-1.24 1.6,1.24, height 2.41
FP-PKM17EPPH4001-B0-MFG [mm]
  rect 1.6x1.6 hole 1.05 paste-2539.97 mask+0: 1(-5,0)
  round 1.6 hole 1.05 paste-2539.97 mask+0: 2(5,0)
  silkscreen extent -8.75,-8.75 8.75,8.75, body extent -8.5,-8.49 8.5,8.49, height 9.2
FP-PTS645SM43SMTR92LFS-MFG [mm]
  rect 1.55x1.3 smd paste+0 mask+0: 1(-3.975,2.25) 2(3.975,2.25) 3(-3.975,-2.25) 4(3.975,-2.25)
  silkscreen extent -5.53,-3 3,3, body extent -3.95,-2.99 3.95,3.01, height 7.79
FP-TS4148_RYG-MFG [mm]
  rect 1.1x1.4 smd paste+0 mask+0: 1(-1.15,0) 2(1.15,0)
  silkscreen extent -2.38,-0.73 0.22,0.73, body extent -1,-0.63 1,0.63, height 0.85
IS-QFN-24_V [mm] "QFN, 24-Leads, Body 4x4mm, Pitch 0.5mm, Thermal Pad 2.7x2.6mm"
  rect 0.8x0.35 smd: 1(-2,1.25) 2(-2,0.75) 3(-2,0.25) 4(-2,-0.25) 5(-2,-0.75) 6(-2,-1.25) 13(2,-1.25) 14(2,-0.75) 15(2,-0.25) 16(2,0.25) 17(2,0.75) 18(2,1.25)
  rect 0.35x0.85 smd mask+0.102: 7(-1.25,-1.975) 8(-0.75,-1.975) 9(-0.25,-1.975) 10(0.25,-1.975) 11(0.75,-1.975) 12(1.25,-1.975) 19(1.25,1.975) 20(0.75,1.975) 21(0.25,1.975) 22(-0.25,1.975) 23(-0.75,1.975) 24(-1.25,1.975)
  rect 2.7x2.6 smd: 25(0,0)
  silkscreen extent -3.08,-2.15 2.15,2.15, body extent -2,-2 2,2, height 0.95
JST_B2B-XH-A(LF)(SN) [mm]
  rect 1.575x1.575 / inner round 1.575 / far side rect 1.575x1.575 hole 1.05: 1(1.25,-0.525)
  round 1.575 hole 1.05: 2(-1.25,-0.525)
  silkscreen extent -3.7,-2.87 4.54,2.88, body extent -3.7,-2.88 3.7,2.88, height 7
Neoway-M590E [mil]
  oval 70x50 smd paste-78.74: 1(-440,485) 2(-440,385) 3(-440,285) 4(-440,185) 5(-440,85) 6(-440,-25) 7(-440,-125) 8(-440,-225) 9(-440,-325) 10(-440,-425) 11(395,-425) 12(395,-325) 13(395,-225) 14(395,-125) 15(395,-25) 16(395,85) 17(395,185) 18(395,285) 19(395,385) 20(395,485) 21(395,585)
  silkscreen extent -455,-470 410,620, body extent -445,-468 405,618, height 100
NXP-SOT23-3_V [mm] "SOT23, 3-Leads, Body 1.3x2.9mm, Pitch 0.95mm"
  rect 0.6x0.7 smd paste-0.05: 1(0.95,1) 2(-0.95,1) 3(0,-1)
  silkscreen extent -1.45,-0.65 1.45,1.79, body extent -1.45,-0.65 1.45,0.65, height 1.1
RESC2013X60X35ML10T20 [mm] "Chip Resistor, 2-Leads, Body 2.1x1.35mm, IPC Low Density"
  rect 1.2x1.45 smd: 1(-1,0) 2(1,0)
  silkscreen extent -0.1,-0.62 0.1,0.62, body extent -1.05,-0.68 1.05,0.67, height 0.6
RESC2013X60X35NL10T20 [mm] "Chip Resistor, 2-Leads, Body 2.1x1.35mm, IPC Medium Density"
  rect 1x1.35 smd: 1(-0.9,0) 2(0.9,0)
  silkscreen extent -0.1,-0.58 0.1,0.58, body extent -1.05,-0.68 1.05,0.67, height 0.6
RESC2013X60X40ML20T25 [mm] "Chip Resistor, 2-Leads, Body 2.00x1.25mm, IPC Low Density"
  rect 1.4x1.55 smd: 1(-0.95,0) 2(0.95,0)
  body extent -1.1,-0.72 1.1,0.72, height 0.6
STM-UFQFPN48_L [mm] "QFN, 48-Leads, Body 7.1x7.1mm, Pitch 0.5mm, Thermal Pad 5.6x5.6mm, IPC High Density"
  oval 0.8x0.25 smd: 1(-3.4,2.75) 2(-3.4,2.25) 3(-3.4,1.75) 4(-3.4,1.25) 5(-3.4,0.75) 6(-3.4,0.25) 7(-3.4,-0.25) 8(-3.4,-0.75) 9(-3.4,-1.25) 10(-3.4,-1.75) 11(-3.4,-2.25) 12(-3.4,-2.75) 25(3.4,-2.75) 26(3.4,-2.25) 27(3.4,-1.75) 28(3.4,-1.25) 29(3.4,-0.75) 30(3.4,-0.25) 31(3.4,0.25) 32(3.4,0.75) 33(3.4,1.25) 34(3.4,1.75) 35(3.4,2.25) 36(3.4,2.75)
  oval 0.25x0.8 smd: 13(-2.75,-3.4) 14(-2.25,-3.4) 15(-1.75,-3.4) 16(-1.25,-3.4) 17(-0.75,-3.4) 18(-0.25,-3.4) 19(0.25,-3.4) 20(0.75,-3.4) 21(1.25,-3.4) 22(1.75,-3.4) 23(2.25,-3.4) 24(2.75,-3.4) 37(2.75,3.4) 38(2.25,3.4) 39(1.75,3.4) 40(1.25,3.4) 41(0.75,3.4) 42(0.25,3.4) 43(-0.25,3.4) 44(-0.75,3.4) 45(-1.25,3.4) 46(-1.75,3.4) 47(-2.25,3.4) 48(-2.75,3.4)
  rect 5.6x5.6 smd: 49(0,0)
  silkscreen extent -4.48,-3.7 3.7,3.7, body extent -3.55,-3.55 3.55,3.55, height 0.6
WE-PD_1280 [mm] "SMT Shielded Power Inductor, 2-leads, body 12x12mm"
  rect 5.4x2.9 smd: 1(0,-4.95) 2(0,4.95)
  Top Layer keep-out region: -6,6 -2.9,6 -2.9,3.3 2.9,3.3 2.9,6 6,6 6,-6 2.9,-6 2.9,-3.3 -2.9,-3.3 -2.9,-6 -6,-6
  silkscreen extent -6.25,-7.02 6.25,6.25, body extent -6,-6 6,6, height 7.51
XCVR_NEO-6M-GPS [mm]
  rect 1.8x0.8 smd paste-2: 1(-6,7) 2(-6,5.9) 3(-6,4.8) 4(-6,3.7) 5(-6,2.6) 6(-6,1.5) 7(-6,0.4) 8(-6,-2.6) 9(-6,-3.7) 10(-6,-4.8) 11(-6,-5.9) 12(-6,-7) 13(6,-7) 14(6,-5.9) 15(6,-4.8) 16(6,-3.7) 17(6,-2.6) 18(6,0.4) 19(6,1.5) 20(6,2.6) 21(6,3.7) 22(6,4.8) 23(6,5.9) 24(6,7)
  silkscreen extent -7.7,-8 6.1,8, body extent -6.1,-8 6.1,8, height 2.6

## Part data
Ant1: library part Antenna
BOOT1 NRST1 SW1 SW2 SW3 SW4 SW5 SW6 SW7 SW8 SW9 SW10 SW11 SW12 SW13 SW14 SW15 SW16 SW17 SW18 SW19 SW20 SW21 SW22 SW23 SW24 SW25 WKUP1: library part CMP-2000-05160-2, "SWITCH TACTILE SPST-NO 0.05A 12V", Case/Package=SMD/SMT, Color=Black, Contact Resistance=100mR, Current Rating=50mA, Max Operating Temperature=60°C, Max Voltage Rating (DC)=12V, Min Operating Temperature=-20°C, Operating Force=160gf, Package Quantity=1, Actuator Length=0.85mm, Actuator Material=Nylon, Actuator Type=Standard, Contact Material=Silver, Contact Plating=Silver, Depth=9mm, Illumination Type=Non-Illuminated, Lead Free="Lead Free", Length=6mm, Max Current Rating=50mA, Mechanical Life=100000Cycles, Mount="Surface Mount", Orientation=Straight, Packaging="Tape and Reel", REACH SVHC="No SVHC", Switch Function=Off-Mom, Termination="Gull Wing", Throw Configuration=SPST, Voltage Rating (DC)=12V
BT1: library part CMP-00214-00028800-1, "105 Battery Holder Coin Cell 1 Cell PC Pin PCB Through Hole Mount PBT 0.944 in. Dia", Max Operating Temperature=145°C, Min Operating Temperature=-50°C, Approvals=UL, Body Material="Glass, Nylon, PBT", Contact Material=Nickel, Contact Plating=Nickel, Diameter=24mm, Height=8.75mm, Lead Free="Lead Free", Material="Plastic, Steel", Mount="PCB, Through Hole", NexarPartId=28800, Number of Batteries=1, Number of Cells=1, Number of Contacts=2, Packaging=Bulk, REACH SVHC="No SVHC", RoHS=Compliant, Termination="PC Pin", Wire/Cable Gauge=1AWG
C1 C4: library part CMP-03020-016664-1, "CAP CER 4.3PF 50V NP0 0805", Capacitance="4.3 pF", Manufacturer=KEMET, Package=C0805C-DN, Temperature="-55°C to +125°C", Temperature Characteristic=C0G, Temperature Coefficient=30ppm/°C, Temperature Range High=+125°C, Temperature Range Low=-55°C, Tolerance="0.25 pF", Voltage Rating="50 V", Automotive=No, Category=Cap, ComponentLink2Description=Datasheet, ComponentLink2URL=https://content.kemet.com/datasheets/KEM_C1003_C0G_SMD.pdf, Device Class L1="Passive Components", Device Class L2=Capacitors, Device Class L3="Ceramic Capacitors", Digikey Description="CAP CER 4.3PF 50V NP0 0805", Height=0.88mm, Ipc Land Pattern Name=CAPC200125X78, Lead Free=Yes, Manufacturer Part Number=C0805C439C5GACTU, Material=Ceramic, Mouser Description="Multilayer Ceramic Capacitors MLCC - SMD/SMT 50volts 4.3pF C0G 0.25%", Octopart=https://octopart.com/c0805c439c5gactu-kemet-9144293, RoHS=TRUE
C2: library part CMP-1036-04819-2, Manufacturer=Kemet, Part Number=C0805C225K9PACTU
C3 C7 C8 C9 C10 C11 C12 C14 C15 C16 C17 C18 C21 C22: library part CMP-2007-04179-1, Manufacturer="AVX Interconnect / Elco", Part Number=08051C152KAT2A
C5 C6: library part CMP-2007-00441-2, "CAP CER 12PF 50V C0G/NP0 0805", Capacitance="12 pF", Manufacturer=KEMET, Package=C0805C-DN, Temperature="-55°C to +125°C", Temperature Characteristic=C0G, Temperature Coefficient=30ppm/°C, Temperature Range High=+125°C, Temperature Range Low=-55°C, Tolerance=0.05, Voltage Rating="50 V", Automotive=No, Category=Cap, ComponentLink2Description=Datasheet, ComponentLink2URL=https://content.kemet.com/datasheets/KEM_C1003_C0G_SMD.pdf, Device Class L1="Passive Components", Device Class L2=Capacitors, Device Class L3="Ceramic Capacitors", Digikey Description="CAP CER 12PF 50V C0G/NP0 0805", Height=0.88mm, Ipc Land Pattern Name=CAPC200125X78, Lead Free=Yes, Manufacturer Part Number=C0805C120J5GACTU, Material=Ceramic, Mouser Description="Multilayer Ceramic Capacitors MLCC - SMD/SMT 50volts 12pF C0G 5%", Octopart=https://octopart.com/c0805c120j5gactu-kemet-126518, RoHS=TRUE
C13: library part CMP-2007-00316-1, Manufacturer=Kemet, Part Number=C0805C221J5GACTU
C19 C20 C23 C24: library part CMP-03020-034676-1, "CAP CER 10UF 6.3V X5R 0805", Capacitance=10uF, Case Code (Imperial)=0805, Case Code (Metric)=2012, Dielectric=X5R, Dielectric Material=Ceramic, Max Operating Temperature=85°C, Min Operating Temperature=-55°C, Package Quantity=1, Tolerance=10%, Voltage=6.3V, Case/Package=0805, Construction=Flat, Contact Material=Tin, Depth=1.25mm, Dissipation Factor=5%, Height=1.25mm, Lead Free="Lead Free", Lead Pitch=0.75mm, Length=2mm, Mount="Surface Mount", Number of Pins=2, Packaging="Tape and Reel", Radiation Hardening=No, REACH SVHC="No SVHC", RoHS Compliant=Yes, Series=C, Termination=SMD/SMT, Thickness=0.055inch, Voltage Rating=6.3V, Voltage Rating (DC)=6.3V, Width=1.2mm
D1: library part CMP-0417-00003-1, "Schottky Barrier Diode, 30 V, 2 uA, -55 to 150 degC, 3-Pin SOT23, RoHS, Tape and Reel", Manufacturer="NXP Semiconductors", Temperature Range="-55 to 150 degC", Cd (pF)=10, ComponentLink1Description="Manufacturer URL", ComponentLink1URL=http://www.nxp.com/, ComponentLink2Description=Datasheet, ComponentLink2URL=http://www.nxp.com/documents/data_sheet/BAT54_SER.pdf, DatasheetVersion="Rev. 5", IR (uA)=2, Mounting Technology="Surface Mount", PackageDescription="3-Pin Plastic Surface-mounted Package, Body 1.3 x 2.9 mm, Pitch 0.95 mm", PackageReference=SOT23-3, Packing="Tape and Reel", PartNumber=BAT54C, RoHS=TRUE, Rth(j-a) (K/W)=500, Trr (ns)=5, VF (mV)=800, VR (V)=30
D2 D3 D4 D5 D6 D7 D8 D9 D10 D11 D12 D13 D14 D15 D16 D17 D18 D19 D20 D21 D22 D23 D24 D25 D26 D27 D28: library part CMP-15605-000006-1, "Rectifier Diode Switching 75V 0.15A 4ns 2-Pin Case 0805(2012Metric) T/R", Case/Package=SMD/SMT, Forward Voltage=1V, Max Forward Surge Current (Ifsm)=2A, Max Operating Temperature=175°C, Max Repetitive Reverse Voltage (Vrrm)=75V, Min Operating Temperature=-65°C, Element Configuration=Single, Mount="Surface Mount", Number of Pins=2, Packaging="Tape and Reel", Peak Non-Repetitive Surge Current=2A, Radiation Hardening=No, Reverse Recovery Time=4ns, RoHS Compliant=Yes
DS1 DS2: library part CMP-2000-06426-1, "LED Uni-Color Red, 65 mW, 25 mA, -40 to 85 degC, 2-Pin SMD, RoHS, Tape and Reel", Emitting Color=Red, Forward Current=25mA, Forward Voltage=2.6V, Manufacturer=Avago, Operating Temp Range=-40Cto85C, Operating Temperature Classification=Industrial, Package Description="2-Pin Surface Mount Device, Body 3.2 x 1.6 mm", Package Reference=HSMX-C150, Package Type=ChipLed, Power Dissipation=78W, Reverse Voltage=5V, Test Current (It)=20mA, Chip Material=GaAlAs, Datasheet URL=http://media.digikey.com/pdf/Data%20Sheets/Avago%20PDFs/HSMz-Czzz.pdf, Datasheet Version=03/2012, DELETED=Compliant, Dominant Wave Length=639nm, High Brightness=No, Lens Dimensions=2x1.6x0.6mm, Lens Type=ColorlessDiffused, Lum Intensity=17mcd, Luminous Intensity=17mcd, Main Category=ChipLED, Manufacturer URL=http://www.avagotech.com/, Mounting=SurfaceMount, Mounting Technology=SurfaceMount, Number of  Elements=1, Packaging=TapeandReel, Peak Wavelength=660nm, Pin Count=2, Product Depth (mm)=1.6mm, Product Height (mm)=1.1mm, Product Length (mm)=3.2mm, Rad Hardened=No, Shape Type=Rectangular, Type=Uni-Color, Viewing Angle=170deg
J1: library part CMP-04763-000009-1, "CONN SIM CARD HINGED TYPE R/A", Current Rating=500mA, Max Operating Temperature=85°C, Min Operating Temperature=-40°C, Voltage Rating=5V, Connector Type=Socket, Contact Material=Bronze, Contact Plating=Gold, Gender=Female, Housing Material=Thermoplastic, Mount="Surface Mount", Number of Circuits=478, Number of Contacts=6, Number of Rows=1, Orientation=Horizontal, Packaging="Tape and Reel", Pitch=2.54mm, RoHS Compliant=Yes, Row Spacing=16.8mm, Series=47388, Termination=SMD/SMT
J2: library part "TFT-LCD-2.8'' Display Headers"
J3 J4: library part CMP-17439-000018-1, "CONN HEADER VERT 4POS 2.5MM", Current Rating=3A, Manufacturer=JST, Temperature="-25°C to +85°C", Temperature Range High=+85°C, Temperature Range Low=-25°C, Voltage Rating=250V, Automotive=No, Category=Conn, ComponentLink2Description=Datasheet, ComponentLink2URL=http://www.jst-mfg.com/product/pdf/eng/eXA1.pdf, Conn Gender=Male, Conn Orientation=Straight, Contact Material=Tin,Copper, Device Class L1=Connectors, Device Class L2="Headers and Wire Housings", Device Class L3=unset, Digikey Description="CONN HEADER VERT 4POS 2.5MM", Height=8.8mm, Lead Free=Yes, Manufacturer Part Number=B04B-XASK-1(LF)(SN), Number of Contacts=4, Number of Rows=1, Octopart=https://octopart.com/b04b-xask-1%28lf%29%28sn%29-jst-3990149, Package=B04B-XASK-1(LF)(SN), Pitch=2.5mm, RoHS=TRUE
L1: library part CMP-00030-39678477-1, "IMC1210ER100K Inductor Chip Molded Wirewound 10uH 10% 2.52MHz 30Q-Factor Powdered Iron 189mA 2.1Ohm DCR 1210 T/R", Case Code (Imperial)=1210, Case Code (Metric)=3225, Current=290mA, Current Rating=189mA, DC Resistance (DCR)=2.1Ω, Inductance=10µH, Inductance Tolerance=10%, Max Operating Temperature=125°C, Min Operating Temperature=-55°C, Self Resonant Frequency=33MHz, Test Frequency=2.52MHz, Case/Package=1210, Composition=Wirewound, Core Material="Ceramic, Ferrite", DC Current=189mA, Depth=2.69mm, Height=2.21mm, Height - Seated (Max)=2.413mm, Lead Free="Lead Free", Length=3.2004mm, Max DC Current=189mA, Military Standard=Not, Mount="Surface Mount", NexarPartId=39678477, Number of Pins=2, Packaging="Cut Tape", Q Factor=30, Radiation Hardening=No, REACH SVHC=Unknown, RoHS=Compliant, Schedule B="8504500000, 8504500000", Shielding=Unshielded, Termination=SMD/SMT, Tolerance=10%, Weight=15.989131mg, Width=2.49mm
L2: library part CMP-0227-00199-2, Ambient Temperature Range High=85°C, Ambient Temperature Range Low=-40°C, Case/Package=Nonstandard, Current Rating=4.2A, DC Resistance (DCR)=31mΩ, Inductance=27µH, Inductance Tolerance=20%, Max DC Current=3.7A, Max Operating Temperature=125°C, Resistance=46mΩ, Saturation Current=3.8A, Self Resonant Frequency=10MHz, Test Frequency=1kHz, Composition=Wirewound, Core Material=Ferrite, Depth=12mm, Height=8mm, Height - Seated (Max)=8.001mm, Lead Free="Lead Free", Lead Pitch=7mm, Length=12mm, Min Operating Temperature=-40°C, Mount="Surface Mount", NexarPartId=22866873, Number of Pins=2, Packaging="Cut Tape (CT)", REACH SVHC=Unknown, RMS Current (Irms)=3.7A, RoHS=Compliant, Series Resistance=46mΩ, Shielding=Shielded, Termination=SMD/SMT, Tolerance=20%, Width=12mm
LS1: library part CMP-06202-000027-1, "AUDIO PIEZO TRANSDUCER 25V TH", Capacitance=7nF, Frequency=4kHz, Max Operating Temperature=70°C, Max Supply Voltage=25V, Min Operating Temperature=-20°C, Nominal Input Voltage=3V, Package Quantity=600, Diameter=17mm, Height=7mm, Lead Free="Lead Free", Max Frequency=4kHz, Mount="Through Hole", Packaging=Bulk, Radiation Hardening=No, REACH SVHC="No SVHC", Self Resonant Frequency=4kHz, Termination=Solder, Voltage Rating=3V, Voltage Rating (DC)=25V, Washable=No
P2 P4: library part "TX_RX Header"
R1 R2 R6 R15 R20 R21: library part CMP-1659-00013-4, "Chip Resistor, 10 KOhm, +/- 1%, 0.125 W, -55 to 155 degC, 0805 (2012 Metric), RoHS, Tape and Reel", Manufacturer=Yageo, Max Operating Temperature="155 degC", Min Operating Temperature="-55 degC", Package Quantity=5000, Voltage Rating="150 V", ComponentLink1Description="Manufacturer URL", ComponentLink1URL=http://www.yageo.com/, ComponentLink2Description=Datasheet, ComponentLink2URL=http://www.yageo.com/documents/recent/PYu-RC_Group_51_RoHS_L_04.pdf, DatasheetVersion="Rev. 4, 02/2016", Height="0.5 mm", Length="2 mm", Mount="Surface Mount", Mounting Technology="Surface Mount", PackageDescription="2-Pin Surface Mounted Device, Body 2 x 1.25 mm", PackageReference=0805, Packaging="Tape and Reel", Pins=2, REACH SVHC="No SVHC", RoHSCompliant=true
R3 R5 R8 R9: library part CMP-2001-00644-1, Manufacturer=Panasonic, Part Number=ERA6AEB472V
R4 R7: library part CMP-03211-006853-1, "CRGCQ 0805 22R 1%", Ambient Temperature Range High=+70°C, Manufacturer="TE Connectivity", Package=CRGCQ0805, Power Rating=0.125W, Resistance=22Ω, Temperature="-55°C to +155°C", Temperature Coefficient=±200ppm/°C, Temperature Range High=+155°C, Temperature Range Low=-55°C, Tolerance=0.01, Voltage Rating=150V, Automotive=Yes, Automotive Grade="Grade 301", Category=Res, ComponentLink2Description=Datasheet, ComponentLink2URL=https://www.te.com/commerce/DocumentDelivery/DDEController?Action=showdoc&DocId=Data+Sheet%7F1773204-3%7F1%7Fpdf%7FEnglish%7FENG_DS_1773204-3_1.pdf%7F4-2176341-310, Composition="Thick Film", Device Class L1="Passive Components", Device Class L2=Resistors, Device Class L3="Chip SMD Resistors", Digikey Description="CRGCQ 0805 22R 1%", Height=0.65mm, Ipc Land Pattern Name=RESC200125X55, Lead Free=Yes, Manufacturer Part Number=CRGCQ0805F22R, Mouser Description="SMD AEC-Q200 Compliant Thick Film Chip Resistor", Octopart=https://octopart.com/crgcq0805f22r-te+connectivity-91018162, RoHS=TRUE, Series=CRGCQ
R10 R11 R12 R13 R14 R16 R17 R18 R19: library part CMP-2100-03671-1, "Chip Resistor, 1 KOhm, +/- 1%, 125 mW, -55 to 155 degC, 0805 (2012 Metric), RoHS, Tape and Reel", Case Code (Imperial)=0805, Case Code (Metric)=2012, Manufacturer=Yageo, Max Operating Temperature=155degC, Max Power Dissipation=125mW, Min Operating Temperature=-55degC, Package Description="2-Pin Surface Mounted Device, Body 2 x 1.25 mm", Package Quantity=1, Resistance=1k, Temperature Coefficient=100ppm/degreesC, Tolerance=1%, Voltage Rating=150V, Case/Package=0805, Composition=ThickFilm, Datasheet URL=http://www.yageo.com/NewPortal/yageodocoutput?fileName=/pdf/R-Chip/PYu-RC_Group_51_RoHS_L_5.pdf, Datasheet Version="Rev. 5, 10/2016", Depth=1.25mm, Height=0.024inch, Lead Free=LeadFree, Length=0.079inch, Manufacturer URL=http://www.yageo.com/, Military Standard=Not, Number of Pins=2, Number of Terminations=2, Package Reference=0805, Packaging=TapeandReel, Power Rating=125mW, REACH SVHC=Unknown, RoHSCompliant=true, Termination=SMD/SMT, Voltage Rating (DC)=150V, Width=0.049inch
U1: library part CMP-0243-00165-1, "ARM Cortex-M4 32-bit MCU+FPU, 512 KB Flash, 128 KB RAM, 36 I/Os, 48-Pin UFQFPN, -40 to 85 degC, Tray", I/Os (High Current)=36, Operating Frequency(F) (Processor speed) (MHz)=100, Package Description=UFQFPN48, Package Reference="48-Pin Ultra Thin Fine Pitch Quad Flat No-Lead, 7 x 7 x 0.6 mm Body, 0.5 mm Pitch, Exposed Pad", Supply Voltage(Vcc) min (V)=1.7, ComponentLink1Description="Manufacturer URL", ComponentLink1URL=http://www.st.com/, ComponentLink2Description=Datasheet, ComponentLink2URL=http://www.st.com/st-web-ui/static/active/en/resource/technical/document/datasheet/DM00115249.pdf, Core="ARM Cortex-M4", DatasheetVersion="Rev. 6", FLASH Size (Prog) (kB)=512, Internal RAM Size (kB)=128, Mounting Technology="Surface Mount", Packing=Tray
U3: "GPS Development Tools SparkFun GNSS-RTK Dead Reckoning Breakout - ZED-F9K (Qwiic)", Package=None, Availability="Not in stock", Check_prices=https://www.snapeda.com/parts/NEO-6M-GPS/u-blox/view-part/?ref=eda, MF=u-blox, MP=NEO-6M-GPS, Price=None, SnapEDA_Link=https://www.snapeda.com/parts/NEO-6M-GPS/u-blox/view-part/?ref=snap
U4: library part CMP-1753-00002-2, "3-Axis Gyroscope, Accelerometer and a Digital Motion Processor(TM) (DMP), 2.375 to 3.46 V, -40 to 85 degC, 24-Pin QFN, RoHS, Tape and Reel", Manufacturer=InvenSense, Standard Package=5,000, Category=Sensors,Transducers, Datasheet URL=http://datasheet.octopart.com/MPU-6050-InvenSense-datasheet-14421344.pdf, Datasheet Version="Rev. 3.3, 05/2012", Dynamic Catalog=MPU-6000™Series, Family=Multifunction, Featured Product=MPU-60506-Axis,IntegratedI²CSolution, Manufacturer URL=http://www.invensense.com/, Online Catalog=MPU-6000™Series, Other Names="1428-1007-2 / MPU6050", Output Type=Digital, Sensor Type=MotionTracking, Unit PriceUSD=Digital
U5: library part CMP-209535-000001-1, "LDO Voltage Regulators 1A, 3.3V", Dropout Voltage=1.1V, Manufacturer="Advanced Monolithic Systems", Max Junction Temp=+125°C, Max Power Dissipation=1.2W, Max Supply Voltage=15V, Nominal Supply Current=5mA, Output Current=1A, Output Voltage=3.3V, Package=AMS1117, Temperature="-40°C to +125°C", Temperature Range Low=-40°C, Automotive=No, Category=IC, ComponentLink2Description=Datasheet, ComponentLink2URL=http://www.advanced-monolithic.com/pdf/ds1117.pdf, Device Class L1="Integrated Circuits (ICs)", Device Class L2="Power Management ICs", Device Class L3="Voltage Regulators - Linear", Height=1.8mm, Ipc Land Pattern Name=SOT229P700X180-4, Lead Free=Yes, Manufacturer Part Number=AMS1117-3.3, Number Of Outputs=1, Octopart=https://octopart.com/ams1117-3.3-advanced+monolithic+systems-25899300, Output Type=Fixed, RoHS=TRUE, Standoff Height=0.64mm, Temperature Range High=+125°C
U6: library part CMP-209535-000001-1, "LDO Voltage Regulators 1A, 3.3V", Dropout Voltage=1.1V, Manufacturer="Advanced Monolithic Systems", Manufacturer Part Number=AMS1117-3.3, Max Junction Temp=+125°C, Max Power Dissipation=1.2W, Max Supply Voltage=15V, Nominal Supply Current=5mA, Output Current=1A, Output Voltage=3.3V, Package=AMS1117, Temperature="-40°C to +125°C", Temperature Range Low=-40°C, Automotive=No, Category=IC, ComponentLink2Description=Datasheet, ComponentLink2URL=http://www.advanced-monolithic.com/pdf/ds1117.pdf, Device Class L1="Integrated Circuits (ICs)", Device Class L2="Power Management ICs", Device Class L3="Voltage Regulators - Linear", Height=1.8mm, Ipc Land Pattern Name=SOT229P700X180-4, Lead Free=Yes, Number Of Outputs=1, Octopart=https://octopart.com/ams1117-3.3-advanced+monolithic+systems-25899300, Output Type=Fixed, RoHS=TRUE, Standoff Height=0.64mm, Temperature Range High=+125°C
Y1: library part CMP-2000-07587-2, "CRYSTAL 32.7680KHZ 6PF SMD", Case/Package=SMD/SMT, ESR (Equivalent Series Resistance)=55kR, Frequency=32.768kHz, Frequency Tolerance=20ppm, Load Capacitance=6pF, Max Operating Temperature=85°C, Min Operating Temperature=-40°C, Operating Frequency="32.768 kHz", Package Quantity=3000, Series Resistance=60kR, Depth=1.5mm, Height=0.035inch, Lead Free="Lead Free", Length=3.2mm, Mount="Surface Mount", Number of Pins=2, Packaging="Tape and Reel", Radiation Hardening=No, REACH SVHC="No SVHC", RoHS Compliant=Yes, Series=ABS07, Termination=SMD/SMT, Tolerance=20ppm, Width=0.061inch
Y2: library part CMP-18717-000190-1, "CRYSTAL 25.0000MHZ 12PF SMD", Case/Package=SMD/SMT, ESR (Equivalent Series Resistance)=50R, Frequency=25MHz, Frequency Stability=150ppm, Frequency Tolerance=30ppm, Load Capacitance=12pF, Max Operating Temperature=125°C, Min Operating Temperature=-40°C, Package Quantity=1000, Ratings=AEC-Q200, Height=0.053inch, Length=0.197inch, Mount="Surface Mount", Number of Pins=2, Packaging="Tape and Reel", REACH SVHC="No SVHC", Series=AA, Termination=SMD/SMT, Tolerance=30ppm, Width=0.126inch

## Via types
v1: diameter 19.68, hole 10.1, Top Layer to 3V3, 228 vias
v2: diameter 19.68, hole 10.1, 3V3 to Bottom Layer, 190 vias
v3: diameter 25, hole 15, Top Layer to Bottom Layer, 63 vias
v4: diameter 25, hole 15, GND to Bottom Layer, 29 vias
v5: diameter 19.68, hole 7.87, Top Layer to Bottom Layer, 29 vias
v6: diameter 25, hole 15, Top Layer to GND, 22 vias
v7: diameter 19.68, hole 10.1, Top Layer to Bottom Layer, 21 vias
v8: diameter 25, hole 15, 3V3 to Bottom Layer, 20 vias
v9: diameter 25, hole 15, GND to 3V3, 4 vias
v10: diameter 25, hole 15, Top Layer to 3V3, 2 vias

## Nets (pads, with @x,y where several pads share a name; then routed paths per layer and width w, separated by ;. In a path a pad name is that pad's centre, name@x,y a point inside that pad or via, vN(x,y) a via of type N, cw(c..) or ccw(c..) an arc to the next point about the centre after c; other vN are vias at no path point)
3V3: BOOT1.1 BOOT1.2 C8.1 C9.1 C10.1 C11.1 C15.2 C16.2 C18.2 C20.1 D1.1 D3.2 J2.7 J3.1 J4.1 L1.2 R8.1 R9.1 R15.1 R21.1 U1.24 U1.36 U1.48 U2.2 U2.3 U3.23 U4.8 U4.13 U5.2 U5.4 | length 4252.2
  Top Layer w20: J3.1@2333.43,8035 2333.43,8113.43 2384.09,8164.09 v6(2474.09,8164.09)
  Bottom Layer w10: 2100.79,9040.79 U4.13@2151.26,9040.79 ; U4.8@2259.53,9012.24 2259.53,8970.47 2280,8950 2300,8950 ; 2351.73,8718.27 U1.36@2396.14,8718.27 ; 2421.73,8426.73 U1.24@2421.73,8476.14 ; U1.48@2638.27,8743.86 2638.27,8783.27
  Bottom Layer w15: BOOT1.2@1520.49,8635.98 1520.49,8640.49 1538.58,8658.58 BOOT1.2@1543.5,8658.58 ; 2062.17,9065 2086.38,9040.79 2100.79,9040.79 ; 2300,8950 2382.95,8950 ; v8(2320,8720) 2321.73,8718.27 2351.73,8718.27 ; v8(2420,8400) 2421.73,8401.73 2421.73,8426.73 ; 2638.27,8783.27 2638.27,8798.27 v8(2640,8800)
  Bottom Layer w20: C15.2@1995,9132.17 2062.17,9065 ; v6(2474.09,8164.09) 2475.05,8163.13 2488.28,8163.13 C8.1@2545,8106.42 ; U2.2@3165,7115 3175,7115 3225,7165 3225,7237.24 3248.28,7260.51 3600.51,7260.51
  Bottom Layer w25: 2382.95,8950 2410,8950 2451.99,8991.99 2451.99,9019.94 2467.05,9035 R9.1@2470,9035
  Bottom Layer w30: R8.1@2210.2,9340 2217.76,9347.56 2217.76,9391.57 2241.19,9415 2315,9415 2455,9275 2520,9275 2545,9300 R15.1@2545,9350 ; C10.1@2781.42,9035 2931.97,9035 D1.1@2942.6,9024.37
  Bottom Layer w35: v8(2790,8410) 2795.57,8415.57 2846.99,8415.57 C11.1@2860,8428.58 ; C18.2@3742.83,9435 3794.02,9383.82 3846.18,9383.82 4210,9020 J2.7@4540,9020
  Bottom Layer w40: R9.1@2470,9035 C16.2@2580,9035 2675,8940 2745,8940 2777.77,8972.77 2777.77,9031.35 C10.1@2781.42,9035 C9.1@2781.42,9185 ; U2.3@3165,7015 U2.2@3165,7115 ; 3600.51,7260.51 3660,7320 3620.55,7359.45 D3.2@3620.55,7450
  other v1: 2287.5,8025 2287.5,8075 2300,8100 2375,8100 2400,8100 2362.5,8125 2387.5,8125 2325,8150 2350,8150 2375,8150 2400,8150 2520,9320 2553.41,9338.72 2540,9360 2580,9360 2520,9414.84 2560,9414.84 2540,9440 2580,9440 2520,9480 2560,9484.84 2575.45,9510.33 2540,9520 2520,9560 2560,9560 2540,9600 2580,9600 2520,9640 2560,9640 2540,9680 2580,9680 2620,9680 2660,9680 2700,9680 2740,9680 2780,9680 2820,9680 2860,9680 2900,9680 2940,9680 2980,9680 3020,9680 3060,9680 3100,9680 3140,9680 3180,9680 3220,9680 3260,9680 3300,9680 3340,9680 3380,9680 3420,9680 3460,9680 3500,9680 3540,9680 2520,9720 2560,9720 2600,9720 2640,9720 2680,9720 2720,9720 2760,9720 2800,9720 2840,9720 2880,9720 2920,9720 2960,9720 3000,9720 3040,9720 3080,9720 3120,9720 3160,9720 3200,9720 3240,9720 3280,9720 3320,9720 3360,9720 3400,9720 3440,9720 3480,9720 3520,9720 3560,9720 2420,9760 2460,9760 2500,9760 2540,9760 2580,9760 2620,9760 2660,9760 2700,9760 2740,9760 2780,9760 2820,9760 2860,9760 2900,9760 2940,9760 2980,9760 3020,9760 3060,9760 3100,9760 3140,9760 3180,9760 3220,9760 3260,9760 3300,9760 3340,9760 3380,9760 3420,9760 3460,9760 3500,9760 3540,9760 3580,9760 2480,9800 2520,9800 2560,9800 2600,9800 2640,9800 2680,9800 2720,9800 2760,9800 2800,9800 2840,9800 2880,9800 2920,9800 2960,9800 3000,9800 3040,9800 3080,9800 3120,9800 3160,9800 3200,9800 3240,9800 3280,9800 3320,9800 3360,9800 3400,9800 3440,9800 3480,9800 3520,9800 3560,9800 2500,9840 2540,9840 2580,9840 2620,9840 2660,9840 2700,9840 2740,9840 2780,9840 2820,9840 2860,9840 2900,9840 2940,9840 2980,9840 3020,9840 3060,9840 3100,9840 3140,9840 3180,9840 3220,9840 3260,9840 3300,9840 3340,9840 3380,9840 3420,9840 3460,9840 3500,9840 3540,9840 3580,9840 2400,9880 2440,9880 2480,9880 2520,9880 2560,9880 2600,9880 2640,9880 2680,9880 2720,9880 2760,9880 2800,9880 2840,9880 2880,9880 2920,9880 2960,9880 3000,9880 3040,9880 3080,9880 3120,9880 3160,9880 3200,9880 3240,9880 3280,9880 3320,9880 3360,9880 3400,9880 3440,9880 3480,9880 3520,9880 3560,9880 2420,9920 2460,9920 2500,9920 2540,9920 2580,9920 2620,9920 2660,9920 2700,9920 2740,9920 2780,9920 2820,9920 2860,9920 2900,9920 2940,9920 2980,9920 3020,9920 3060,9920 3100,9920 3140,9920 3180,9920 3220,9920 3260,9920 3300,9920 3340,9920 3380,9920 3420,9920 3460,9920 3500,9920 3540,9920 3580,9920
  other v2: 3640,7360 3680,7360 3720,7360 3760,7360 3800,7360 3620,7400 1480,8560 1500,8600 1540,8600 1580,8600 1620,8600 1660,8600 1700,8600 1740,8600 1780,8600 1820,8600 1860,8600 1900,8600 1480,8640 1600,8640 1640,8640 1680,8640 1720,8640 1760,8640 1800,8640 1920,8640 1620,8680 1660,8680 1700,8680 1740,8680 1780,8680 1400,8720 1440,8720 1880,8720 1920,8720 1420,8760 1460,8760 1900,8760 1940,8760 2078.47,8798.47 1400,8800 1960,8800 2000,8800 2040,8800 1500,8840 1400,8880 1480,8880 1400,8960 1440,8960 1480,8960 2850,9000 2875,9000 2900,9000 2837.5,9025 2862.5,9025 2887.5,9025 2912.5,9025 1400,9040 2850,9050 2875,9050 2900,9050 2837.5,9075 2862.5,9075 2887.5,9075 2912.5,9075 2937.5,9075 2775,9100 2800,9100 2825,9100 2850,9100 2875,9100 2900,9100 1400,9120 1880,9120 1920,9120 2787.5,9125 2812.5,9125 2837.5,9125 2862.5,9125 2887.5,9125 2850,9150 1420,9160 1500,9160 1540,9160 1580,9160 1620,9160 1660,9160 1700,9160 1740,9160 1780,9160 1820,9160 1860,9160 1900,9160 2837.5,9175 1400,9200 1440,9200 1480,9200 1520,9200 1560,9200 1600,9200 1640,9200 1680,9200 1720,9200 1760,9200 1800,9200 1840,9200 1880,9200 1920,9200 1900,9240 1880,9280 1920,9280 1900,9320 2580,9320 1880,9360 1920,9360 1900,9400 1940,9400 2140,9400 2180,9400 2540,9400 2580,9400 1920,9440 1960,9440 2000,9440 2040,9440 2072.66,9440 2120,9440 2160,9440 2520,9440 2560,9440 2540,9480 2580,9484.84 2520,9520 2560,9520 3720,9520 2540,9560 2580,9560 3460,9560 3500,9560 2520,9600 2560,9600 2540,9640 2580,9640 3460,9640 3500,9640 2520,9680 2560,9680 3440,9680 3480,9680 2540,9720 2580,9720 3420,9720 3460,9720 3500,9720 2400,9760 2440,9760 2480,9760 2520,9760 2560,9760 3400,9760 3440,9760 3480,9760 3520,9760 2500,9800 2540,9800 2580,9800 3420,9800 3460,9800 3500,9800 2480,9840 2520,9840 2560,9840 3560,9840 3600,9840 3640,9840 2380,9880 2420,9880 2460,9880 2500,9880 2540,9880 2580,9880 3540,9880 3580,9880 3620,9880 3740,9880 2400,9920 2440,9920 2480,9920 2520,9920 2560,9920
  other v4: 2474.09,8164.09
5V: C22.2 C24.1 J2.14 R20.1 U6.2 U6.4 | length 3960.2
  Bottom Layer w30: R20.1@2885,9380 2885,9562.34 2900.94,9578.28 C24.1@2900.94,9705 ; C24.1@2904.64,9708.7 2904.64,9769.64 2930,9795 3040,9795
  Bottom Layer w40: U6.4@3905,9865 3862.13,9865 3772.13,9955 3200,9955 3040,9795 3012.17,9767.17 C22.2@3012.17,9375 3012.17,9277.83 3195,9095 3765,9095 J2.14@4540,8320
ADC_OUT: R18.1 R19.2 U1.11 | length 1995.8
  Top Layer w10: v6(2660,8845) 2660,9485 v3(2790,9615) ; v4(2715,8510) 2715,8505.96 2735.96,8485 2771.82,8485 2815,8528.18 v6(2815,8695)
  Top Layer w20: v3(2790,9615) v3(3145,9615)
  GND w10: v6(2660,8845) 2662.5,8845 2812.5,8695 v6(2815,8695)
  Bottom Layer w10: U1.11@2663.86,8521.42 2681.84,8521.42 2690.38,8512.87 2712.13,8512.87 v4(2715,8510)
  Bottom Layer w20: R19.2@2716.26,9710 2727.93,9698.33 2727.93,9667.07 2779.04,9615.96 2789.04,9615.96 v3(2790,9615) ; v3(3145,9615) 3169.37,9639.37 R18.1@3169.37,9720
  other v6: 2715,8510
ANT: Ant2.1 L2.2 U3.11 | length 1572.8
  Bottom Layer w20: L2.2@3244.88,7680 3461.11,7680 3520.33,7739.22 4144.37,7739.22 4286.54,7881.39 U3.11@4286.54,7916.22 ; U3.11@4292.28,7916.22 4298.03,7921.97 4298.03,7958.03 4345,8005 4520,8005 Ant2.1@4610,7915
BOOT: U1.29 U2.19 | length 1752.5
  3V3 w10: v3(2230,8565) 2230,8207.69 2405,8032.69 v3(2405,7145)
  Bottom Layer w10: v3(2230,8565) 2232.5,8567.5 2260.18,8567.5 2265.18,8572.5 2342.93,8572.5 2350.9,8580.47 U1.29@2396.14,8580.47 ; U2.19@2330,7115 2375,7115 v3(2405,7145)
Buzzer: LS1.1 U1.38 | length 1487.1
  Top Layer w10: LS1.1@1335,9595 2068.41,8861.59 2078.41,8861.59 2081.45,8864.63 2103.72,8864.63 v3(2106.59,8867.5)
  Bottom Layer w10: v3(2106.59,8867.5) 2357.5,8867.5 2441.42,8783.58 U1.38@2441.42,8743.86
CLK: J1.C5 U2.12 | length 928.4
  Bottom Layer w10: J1.C5@1678.9,6982.6 1690.71,6982.6 2058.31,6615 2175,6615 2255,6535 2255,6470 2320,6405 U2.12@2330,6405
CS: J2.12 U1.14 | length 2144.8
  Top Layer w10: v3(2695,8355) 2790,8260 4280,8260 J2.12@4540,8520
  Bottom Layer w10: U1.14@2618.58,8476.14 2618.58,8431.42 v3(2695,8355)